# EAGLE board BeagleBone_Blue (EAGLE 7.6.0), part 1 of 3
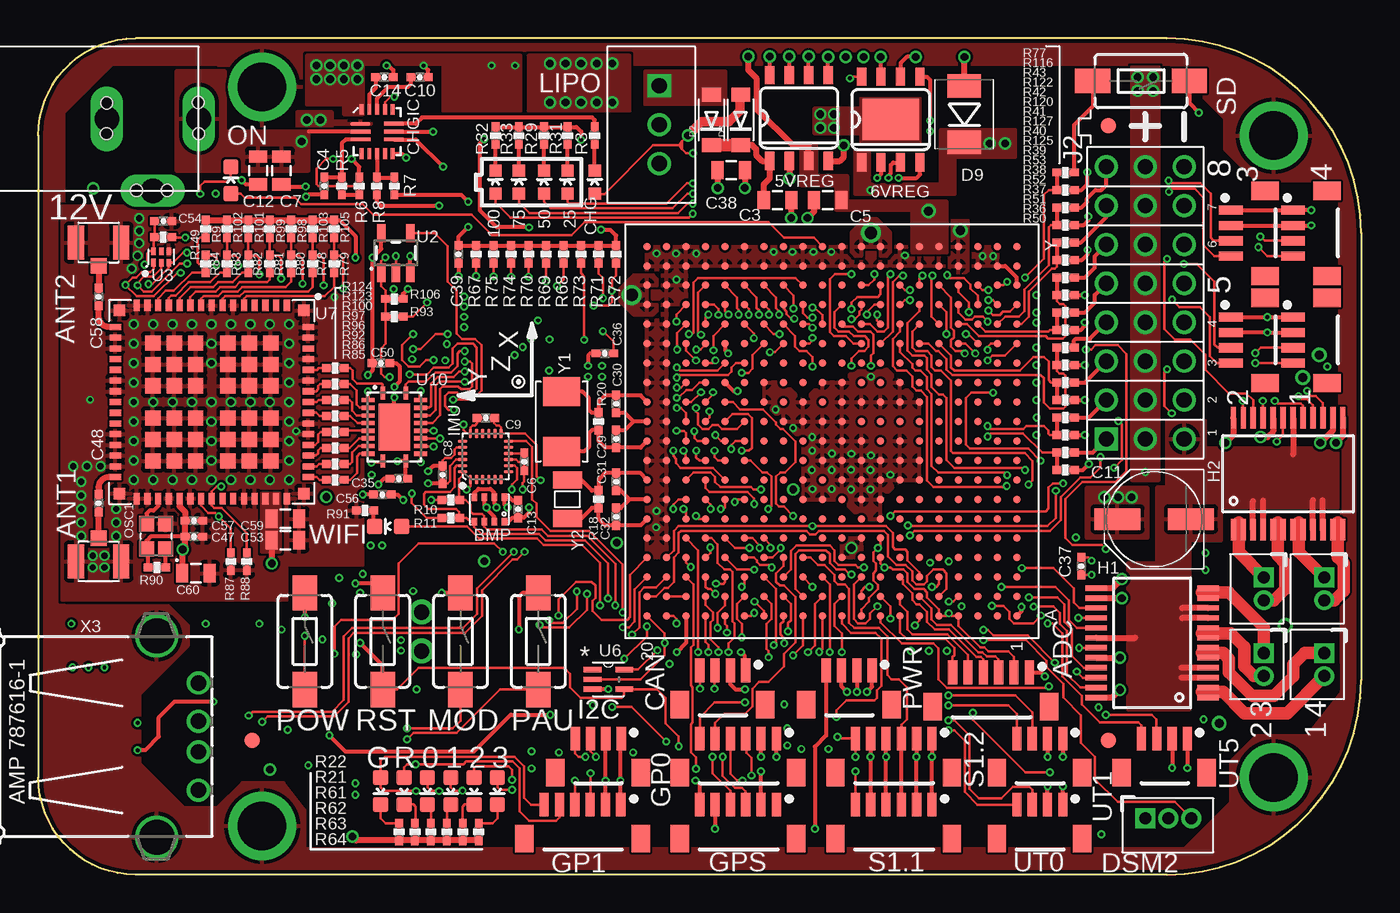
[diagram p0: board, top side]
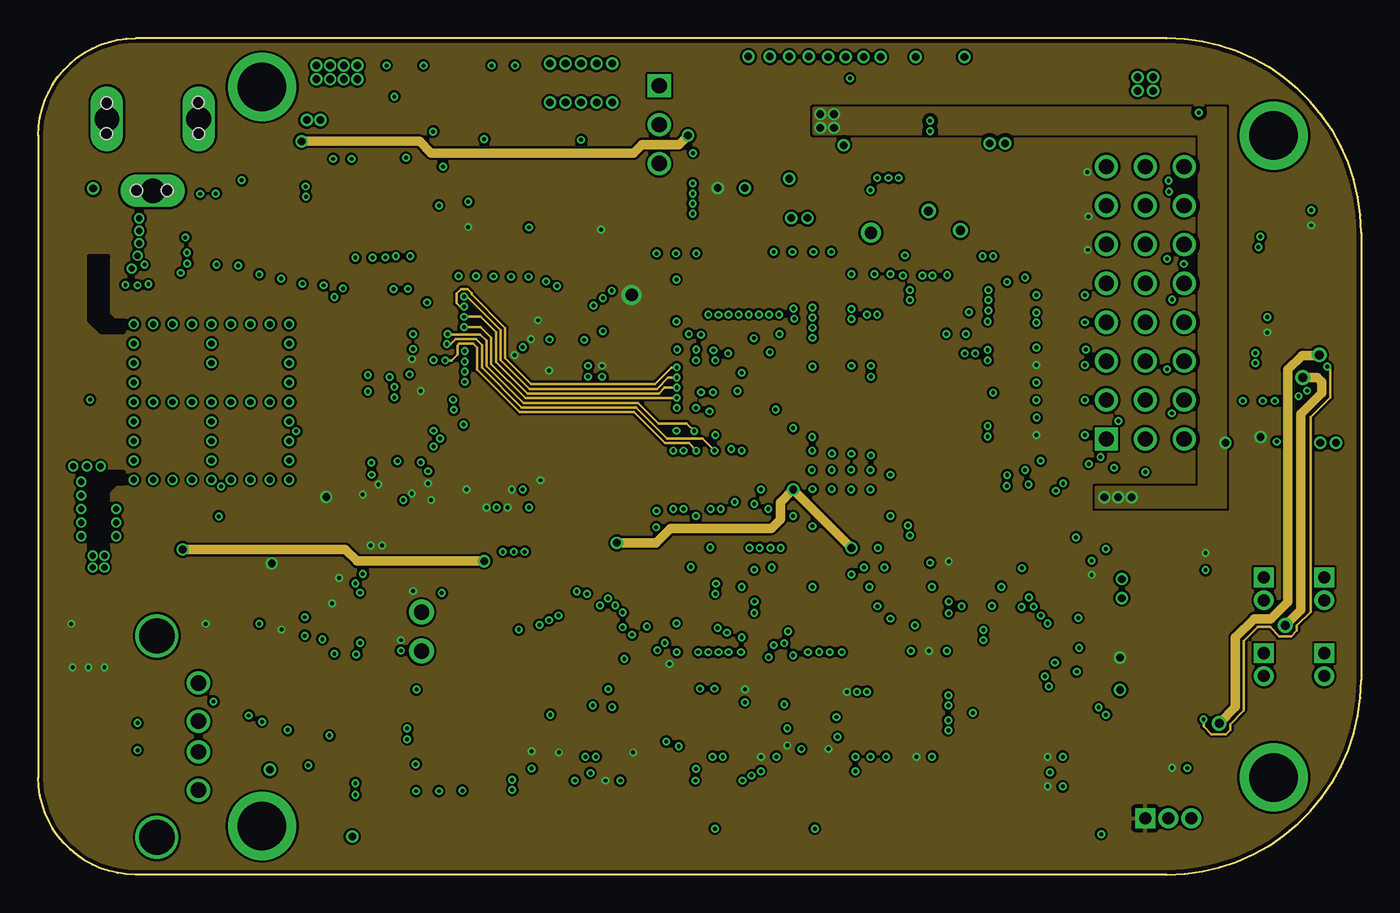
[diagram p1: board, inner layer Route2]
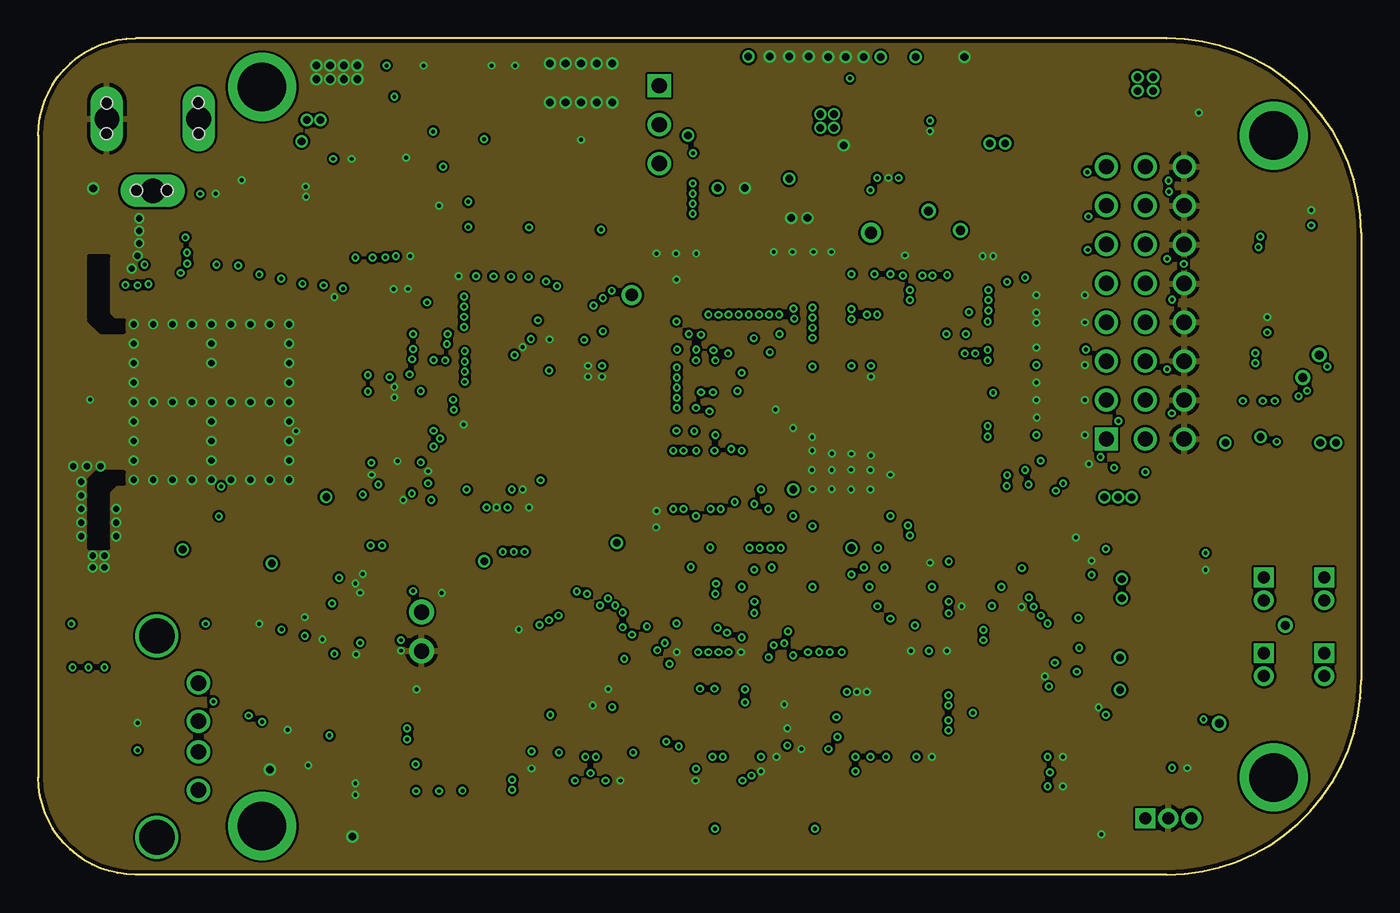
[diagram p2: board, inner layer Route15]
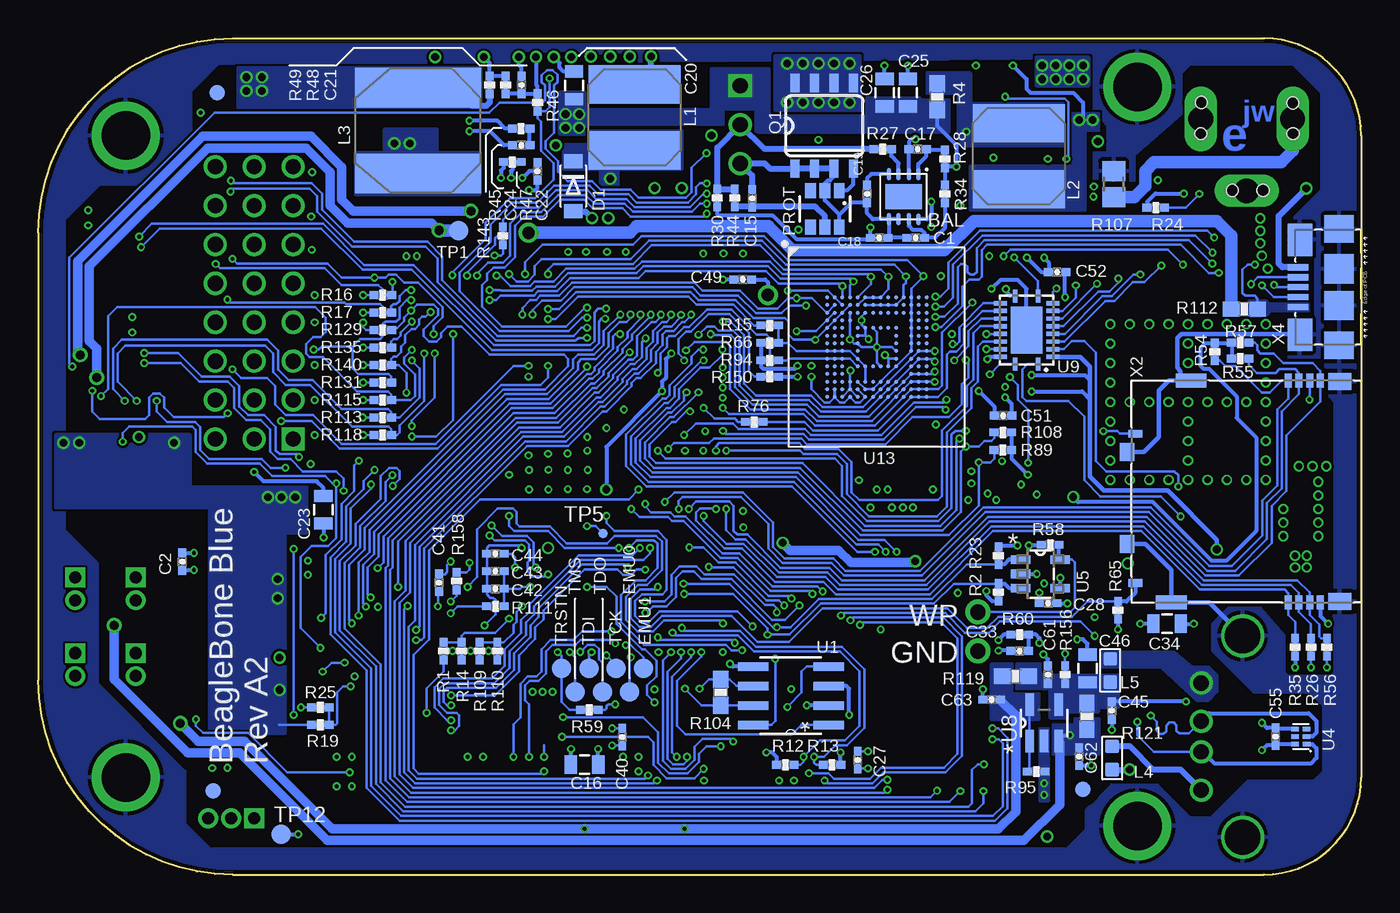
[diagram p3: board, bottom side, seen from below]

Size 86.36 x 54.61 mm. Coordinates in mm from the lower left corner, seen from the top.
Copper layers (1+2*15+16): Top 0.0178mm / dielectric 12mil / Route2 0.0356mm / dielectric 28mil / Route15 0.0356mm / dielectric 12mil / Bottom 0.0178mm
Design rules "SSC-EAGLE-4Lyr_v1.0.0.3 *": minimum track width 6mil, minimum drill 10mil, track to track 6mil, track to pad 6mil, pad to pad 6mil, via to via 6mil, smd to smd 6mil, copper to edge 10mil, drill to drill 8mil, minimum pad ring 10mil, minimum via ring 5mil, stop-mask expansion 3mil, vias tented up to drill 40mil, thermal gap 10mil
Net classes: 0 default: width 0.152 mm, drill 0.254 mm, clearance 0.152 mm; 1 ground: width 0.152 mm, drill 0.254 mm, clearance 0.152 mm; 2 usb: width 0.152 mm, drill 0.254 mm, clearance 0.152 mm; 3 power: width 0.152 mm, drill 0.254 mm, clearance 0.152 mm

## Footprints (pad centres in the part's own frame; a part is rotated, then mirrored left to right if it is on the bottom)
BEAGLEBONE_BLUE_LED-0603 = smd 1 x 1: A 0,-0.877; C 0,0.877
BEAGLEBONE_BLUE_SO08-TIGHT = smd 0.6 x 1.2: 1 -1.905,-2.8; 2 -0.635,-2.8; 3 0.635,-2.8; 4 1.905,-2.8; 5 1.905,2.8; 6 0.635,2.8; 7 -0.635,2.8; 8 -1.905,2.8
SO08-EXPOSED = smd 0.6 x 1.2: 1 -1.905,-2.8; 2 -0.635,-2.8; 3 0.635,-2.8; 4 1.905,-2.8; 5 1.905,2.8; 6 0.635,2.8; 7 -0.635,2.8; 8 -1.905,2.8 | smd 3.683 x 2.718: 9 0,0
PJ-102B_POWER_CON = drill 1.6 long: IN -6,0; OUT 0,0; OUT_CON -3,4.7 | hole 0.762: 0,-1.041; 0.025,0.965; -5.994,0.965; -5.969,-1.067; -1.93,4.674; -3.937,4.674
JST_SH_6 = smd 0.6 x 1.55: 1 5,0; 2 4,0; 3 3,0; 4 2,0; 5 1,0; 6 0,0 | smd 1.2 x 1.8: P$1 -1.3,-2.225; P$2 6.3,-2.225
U.FL-R-SMT-1 = smd 1.05 x 2.2: GND1 -1.475,0; GND2 1.475,0 | smd 1.05 x 1: SIG 0,-1.525
LED-0603 = smd 0.8 x 0.8: A 0,-0.75; C 0,0.75
8-SON_3X3MM = smd 0.305 x 0.813: 1 -0.965,-1.473; 2 -0.33,-1.473; 3 0.33,-1.473; 4 0.965,-1.473; 5 0.965,1.473; 6 0.33,1.473; 7 -0.33,1.473 | smd 0.305 x 0.787: 8 -0.965,1.473 | smd 2.4 x 1.651: PAD 0,0
BMP280 = smd 0.5 x 0.35: 1 0.8,0.975; 2 0.8,0.325; 3 0.8,-0.325; 4 0.8,-0.975; 5 -0.8,-0.975; 6 -0.8,-0.325; 7 -0.8,0.325; 8 -0.8,0.975
0402-CAP = smd 0.61 x 0.508: 1 -0.559,0; 2 0.559,0
0805 = smd 0.8 x 1.2: 1 -0.9,0; 2 0.9,0
PANASONIC_D = smd 3 x 1.4: + 2.4,0; - -2.4,0
JST_SH_4_SMD = smd 0.6 x 1.55: 1 0.46,1.27; 2 -0.54,1.27; 3 -1.54,1.27; 4 -2.54,1.27 | smd 1.2 x 1.8: P$1 -3.84,-0.955; P$2 1.728,-0.955
MP2615 = smd 1.295 x 0.254: 1 -1.092,0.508; 2 -1.092,0; 3 -1.092,-0.508; 9 1.092,-0.508; 10 1.092,0; 11 1.092,0.508 | smd 0.254 x 0.711: 4 -1.016,-1.448; 5 -0.508,-1.448; 6 0,-1.448; 7 0.508,-1.448; 8 1.016,-1.448; 12 1.016,1.448; 13 0.508,1.448; 14 0,1.448; 15 -0.508,1.448; 16 -1.016,1.448
ADAFRUIT_SOD-123FL = smd 0.91 x 1.22: A 1.637,0; C -1.637,0
DO-214AA = smd 1.524 x 2.184: A 1.841,0; C -1.841,0
JST_ZH_3 = drill 0.787 square: P$1 0,0 | drill 0.787: P$2 1.499,0; P$3 2.997,0
B1,27 = smd 1.27 x 1.27: TP 0,0
FIDUCIAL_40MIL = smd 1.016 x 1.016: P$1 0,0
GHI2_TESTPAD/W_HOLE_1X1 = drill 1 pad 1.626: P$1 0,0
SSOP24 = smd 0.348 x 1.397: 1 -3.575,-3.656; 2 -2.925,-3.656; 3 -2.275,-3.656; 4 -1.625,-3.656; 5 -0.975,-3.656; 6 -0.325,-3.656; 7 0.325,-3.656; 8 0.975,-3.656; 9 1.625,-3.656; 10 2.275,-3.656; 11 2.925,-3.656; 12 3.575,-3.656; 13 3.575,3.656; 14 2.925,3.656; 15 2.275,3.656; 16 1.625,3.656; 17 0.975,3.656; 18 0.325,3.656; 19 -0.325,3.656; 20 -0.975,3.656; 21 -1.625,3.656; 22 -2.275,3.656; 23 -2.925,3.656; 24 -3.575,3.656
QFN24G-0.4-3X3MM = smd 0.6 x 0.2: 1 -1.5,1; 2 -1.5,0.6; 3 -1.5,0.2; 4 -1.5,-0.2; 5 -1.5,-0.6; 6 -1.5,-1; 13 1.5,-1; 14 1.5,-0.6; 15 1.5,-0.2; 16 1.5,0.2; 17 1.5,0.6; 18 1.5,1 | smd 0.2 x 0.6: 7 -1,-1.5; 8 -0.6,-1.5; 9 -0.2,-1.5; 10 0.2,-1.5; 11 0.6,-1.5; 12 1,-1.5; 19 1,1.5; 20 0.6,1.5; 21 0.2,1.5; 22 -0.2,1.5; 23 -0.6,1.5; 24 -1,1.5
STRAWSON_EAGLE_LIB_3X8_0.1"_HEADER = drill 1 square: P$1 -2.54,-17.78 | drill 1: P$2 -2.54,-15.24; P$3 -2.54,-12.7; P$4 -2.54,-10.16; P$5 -2.54,-7.62; P$6 -2.54,-5.08; P$7 0,-17.78; P$8 0,-15.24; P$9 0,-12.7; P$10 0,-10.16; P$11 0,-7.62; P$12 0,-5.08; P$13 2.54,-17.78; P$14 2.54,-15.24; P$15 2.54,-12.7; P$16 2.54,-10.16; P$17 2.54,-7.62; P$18 2.54,-5.08; P$19 -2.54,-2.54; P$20 -2.54,0; P$21 0,-2.54; P$22 0,0; P$23 2.54,-2.54; P$24 2.54,0
SRN6045 = smd 2.5 x 6: 1 -2.175,-0.175; 2 2.125,-0.175
8X8MM_INDUCTOR = smd 2.591 x 8.204: 1 -2.794,0; 2 2.794,0
L0603 = smd 0.889 x 0.889: 1 -0.762,0; 2 0.762,0
JST_XH_3-PIN = drill 1 square: P$1 0,0 | drill 1: P$2 0,-2.54; P$3 0,-5.08
JST_ZH_2 = drill 0.787 pad 1.219 square: P$1 -0.749,0 | drill 0.787 pad 1.219: P$2 0.749,0
MOUNTING_HOLE = drill 3.175 pad 4.445: P$1 0,0
TACTILE-SWITCH-1101NE = smd 2.3 x 1.6: 1 -3.15,0; 2 3.15,0
NZ2520S = smd 1 x 1: 1 -0.825,-0.625; 2 0.825,-0.625; 3 0.825,0.625; 4 -0.825,0.625
SOT-236 = smd 0.991 x 0.711: 1 -1.194,0.94; 2 -1.194,0; 3 -1.194,-0.94; 4 1.194,-0.94; 5 1.194,0; 6 1.194,0.94
SO08-TIGHT = smd 0.6 x 1.2: 1 -1.905,-2.8; 2 -0.635,-2.8; 3 0.635,-2.8; 4 1.905,-2.8; 5 1.905,2.8; 6 0.635,2.8; 7 -0.635,2.8; 8 -1.905,2.8
0402-RES = smd 0.61 x 0.508: 1 -0.559,0; 2 0.559,0
0603-RES = smd 1.1 x 1: 1 -0.85,0; 2 0.85,0
R0805 = smd 1.3 x 1.5: 1 -0.85,0; 2 0.85,0
BEAGLEBONE_BLUE_OSD3358 = smd 0.5 x 0.5: A1 -12.065,-12.065; A2 -12.065,-10.795; A3 -12.065,-9.525; A4 -12.065,-8.255; A5 -12.065,-6.985; A6 -12.065,-5.715; A7 -12.065,-4.445; A8 -12.065,-3.175; A9 -12.065,-1.905; A10 -12.065,-0.635; A11 -12.065,0.635; A12 -12.065,1.905; A13 -12.065,3.175; A14 -12.065,4.445; A15 -12.065,5.715; A16 -12.065,6.985; A17 -12.065,8.255; A18 -12.065,9.525; A19 -12.065,10.795; A20 -12.065,12.065; B1 -10.795,-12.065; B2 -10.795,-10.795; B3 -10.795,-9.525; B4 -10.795,-8.255; B5 -10.795,-6.985; B6 -10.795,-5.715; B7 -10.795,-4.445; B8 -10.795,-3.175; B9 -10.795,-1.905; B10 -10.795,-0.635; B11 -10.795,0.635; B12 -10.795,1.905; B13 -10.795,3.175; B14 -10.795,4.445; B15 -10.795,5.715; B16 -10.795,6.985; B17 -10.795,8.255; B18 -10.795,9.525; B19 -10.795,10.795; B20 -10.795,12.065; C1 -9.525,-12.065; C2 -9.525,-10.795; C3 -9.525,-9.525; C4 -9.525,-8.255; C5 -9.525,-6.985; C6 -9.525,-5.715; C7 -9.525,-4.445; C8 -9.525,-3.175; C9 -9.525,-1.905; C10 -9.525,-0.635; C11 -9.525,0.635; C12 -9.525,1.905; C13 -9.525,3.175; C14 -9.525,4.445; C15 -9.525,5.715; C16 -9.525,6.985; C17 -9.525,8.255; C18 -9.525,9.525; C19 -9.525,10.795; C20 -9.525,12.065; D1 -8.255,-12.065; D2 -8.255,-10.795; D3 -8.255,-9.525; D4 -8.255,-8.255; D5 -8.255,-6.985; D6 -8.255,-5.715; D7 -8.255,-4.445; D8 -8.255,-3.175; D9 -8.255,-1.905; D10 -8.255,-0.635; D11 -8.255,0.635; D12 -8.255,1.905; D13 -8.255,3.175; D14 -8.255,4.445; D15 -8.255,5.715; D16 -8.255,6.985; D17 -8.255,8.255; D18 -8.255,9.525; D19 -8.255,10.795; D20 -8.255,12.065; E1 -6.985,-12.065; E2 -6.985,-10.795; E3 -6.985,-9.525; E4 -6.985,-8.255; E5 -6.985,-6.985; E6 -6.985,-5.715; E7 -6.985,-4.445; E8 -6.985,-3.175; E9 -6.985,-1.905; E10 -6.985,-0.635; E11 -6.985,0.635; E12 -6.985,1.905; E13 -6.985,3.175; E14 -6.985,4.445; E15 -6.985,5.715; E16 -6.985,6.985; E17 -6.985,8.255; E18 -6.985,9.525; E19 -6.985,10.795; E20 -6.985,12.065; F1 -5.715,-12.065; F2 -5.715,-10.795; F3 -5.715,-9.525; F4 -5.715,-8.255; F5 -5.715,-6.985; F6 -5.715,-5.715; F7 -5.715,-4.445; F8 -5.715,-3.175; F9 -5.715,-1.905; F10 -5.715,-0.635; F11 -5.715,0.635; F12 -5.715,1.905; F13 -5.715,3.175; F14 -5.715,4.445; F15 -5.715,5.715; F16 -5.715,6.985; F17 -5.715,8.255; F18 -5.715,9.525; F19 -5.715,10.795; F20 -5.715,12.065; G1 -4.445,-12.065; G2 -4.445,-10.795; G3 -4.445,-9.525; G4 -4.445,-8.255; G5 -4.445,-6.985; G6 -4.445,-5.715; G7 -4.445,-4.445; G8 -4.445,-3.175; G9 -4.445,-1.905; G10 -4.445,-0.635; G11 -4.445,0.635; G12 -4.445,1.905; G13 -4.445,3.175; G14 -4.445,4.445; G15 -4.445,5.715; G16 -4.445,6.985; G17 -4.445,8.255; G18 -4.445,9.525; G19 -4.445,10.795; G20 -4.445,12.065; H1 -3.175,-12.065; H2 -3.175,-10.795; H3 -3.175,-9.525; H4 -3.175,-8.255; H5 -3.175,-6.985; H6 -3.175,-5.715; H7 -3.175,-4.445; H8 -3.175,-3.175; H9 -3.175,-1.905; H10 -3.175,-0.635; H11 -3.175,0.635; H12 -3.175,1.905; H13 -3.175,3.175; H14 -3.175,4.445; H15 -3.175,5.715; H16 -3.175,6.985; H17 -3.175,8.255; H18 -3.175,9.525; H19 -3.175,10.795; H20 -3.175,12.065; J1 -1.905,-12.065; J2 -1.905,-10.795; J3 -1.905,-9.525; J4 -1.905,-8.255; J5 -1.905,-6.985; J6 -1.905,-5.715; J7 -1.905,-4.445; J8 -1.905,-3.175; J9 -1.905,-1.905; J10 -1.905,-0.635; J11 -1.905,0.635; J12 -1.905,1.905; J13 -1.905,3.175; J14 -1.905,4.445; J15 -1.905,5.715; J16 -1.905,6.985; J17 -1.905,8.255; J18 -1.905,9.525; J19 -1.905,10.795; J20 -1.905,12.065; K1 -0.635,-12.065; K2 -0.635,-10.795; K3 -0.635,-9.525; K4 -0.635,-8.255; K5 -0.635,-6.985; K6 -0.635,-5.715; K7 -0.635,-4.445; K8 -0.635,-3.175; K9 -0.635,-1.905; K10 -0.635,-0.635; K11 -0.635,0.635; K12 -0.635,1.905; K13 -0.635,3.175; K14 -0.635,4.445; K15 -0.635,5.715; K16 -0.635,6.985; K17 -0.635,8.255; K18 -0.635,9.525; K19 -0.635,10.795; K20 -0.635,12.065; L1 0.635,-12.065; L2 0.635,-10.795; L3 0.635,-9.525; L4 0.635,-8.255; L5 0.635,-6.985; L6 0.635,-5.715; L7 0.635,-4.445; L8 0.635,-3.175; L9 0.635,-1.905; L10 0.635,-0.635; L11 0.635,0.635; L12 0.635,1.905; L13 0.635,3.175; L14 0.635,4.445; L15 0.635,5.715; L16 0.635,6.985; L17 0.635,8.255; L18 0.635,9.525; L19 0.635,10.795; L20 0.635,12.065; M1 1.905,-12.065; M2 1.905,-10.795; M3 1.905,-9.525; M4 1.905,-8.255; M5 1.905,-6.985; M6 1.905,-5.715; M7 1.905,-4.445; M8 1.905,-3.175; M9 1.905,-1.905; M10 1.905,-0.635; M11 1.905,0.635; M12 1.905,1.905; M13 1.905,3.175; M14 1.905,4.445; M15 1.905,5.715; M16 1.905,6.985; M17 1.905,8.255; M18 1.905,9.525; M19 1.905,10.795; M20 1.905,12.065; N1 3.175,-12.065; N2 3.175,-10.795; N3 3.175,-9.525; N4 3.175,-8.255; N5 3.175,-6.985; N6 3.175,-5.715; N7 3.175,-4.445; N8 3.175,-3.175; N9 3.175,-1.905; N10 3.175,-0.635; N11 3.175,0.635; N12 3.175,1.905; N13 3.175,3.175; N14 3.175,4.445; N15 3.175,5.715; N16 3.175,6.985; N17 3.175,8.255; N18 3.175,9.525; N19 3.175,10.795; N20 3.175,12.065; P1 4.445,-12.065; P2 4.445,-10.795; P3 4.445,-9.525; P4 4.445,-8.255; P5 4.445,-6.985; P6 4.445,-5.715; P7 4.445,-4.445; P8 4.445,-3.175; P9 4.445,-1.905; P10 4.445,-0.635; P11 4.445,0.635; P12 4.445,1.905; P13 4.445,3.175; P14 4.445,4.445; P15 4.445,5.715; P16 4.445,6.985; P17 4.445,8.255; P18 4.445,9.525; P19 4.445,10.795; P20 4.445,12.065; R1 5.715,-12.065; R2 5.715,-10.795; R3 5.715,-9.525; R4 5.715,-8.255; R5 5.715,-6.985; R6 5.715,-5.715; R7 5.715,-4.445; R8 5.715,-3.175; R9 5.715,-1.905; R10 5.715,-0.635; R11 5.715,0.635; R12 5.715,1.905; R13 5.715,3.175; R14 5.715,4.445; R15 5.715,5.715; R16 5.715,6.985; R17 5.715,8.255; R18 5.715,9.525; R19 5.715,10.795; R20 5.715,12.065; T1 6.985,-12.065; T2 6.985,-10.795; T3 6.985,-9.525; T4 6.985,-8.255; T5 6.985,-6.985; T6 6.985,-5.715; T7 6.985,-4.445; T8 6.985,-3.175; T9 6.985,-1.905; T10 6.985,-0.635; T11 6.985,0.635; T12 6.985,1.905; T13 6.985,3.175; T14 6.985,4.445; T15 6.985,5.715; T16 6.985,6.985; T17 6.985,8.255; T18 6.985,9.525; T19 6.985,10.795; T20 6.985,12.065; U1 8.255,-12.065; U2 8.255,-10.795; U3 8.255,-9.525; U4 8.255,-8.255; U5 8.255,-6.985; U6 8.255,-5.715; U7 8.255,-4.445; U8 8.255,-3.175; U9 8.255,-1.905; U10 8.255,-0.635; U11 8.255,0.635; U12 8.255,1.905; U13 8.255,3.175; U14 8.255,4.445; U15 8.255,5.715; U16 8.255,6.985; U17 8.255,8.255; U18 8.255,9.525; U19 8.255,10.795; U20 8.255,12.065; V1 9.525,-12.065; V2 9.525,-10.795; V3 9.525,-9.525; V4 9.525,-8.255; V5 9.525,-6.985; V6 9.525,-5.715; V7 9.525,-4.445; V8 9.525,-3.175; V9 9.525,-1.905; V10 9.525,-0.635; V11 9.525,0.635; V12 9.525,1.905; V13 9.525,3.175; V14 9.525,4.445; V15 9.525,5.715; V16 9.525,6.985; V17 9.525,8.255; V18 9.525,9.525; V19 9.525,10.795; V20 9.525,12.065; W1 10.795,-12.065; W2 10.795,-10.795; W3 10.795,-9.525; W4 10.795,-8.255; W5 10.795,-6.985; W6 10.795,-5.715; W7 10.795,-4.445; W8 10.795,-3.175; W9 10.795,-1.905; W10 10.795,-0.635; W11 10.795,0.635; W12 10.795,1.905; W13 10.795,3.175; W14 10.795,4.445; W15 10.795,5.715; W16 10.795,6.985; W17 10.795,8.255; W18 10.795,9.525; W19 10.795,10.795; W20 10.795,12.065; Y1 12.065,-12.065; Y2 12.065,-10.795; Y3 12.065,-9.525; Y4 12.065,-8.255; Y5 12.065,-6.985; Y6 12.065,-5.715; Y7 12.065,-4.445; Y8 12.065,-3.175; Y9 12.065,-1.905; Y10 12.065,-0.635; Y11 12.065,0.635; Y12 12.065,1.905; Y13 12.065,3.175; Y14 12.065,4.445; Y15 12.065,5.715; Y16 12.065,6.985; Y17 12.065,8.255; Y18 12.065,9.525; Y19 12.065,10.795; Y20 12.065,12.065
BEAGLEBONE_BLUE_B0,65 = smd 0.635 x 0.635: TP 0,0
BEAGLEBONE_BLUE_D8 = smd 1.981 x 0.559: 1 -2.464,1.905; 2 -2.464,0.635; 3 -2.464,-0.635; 4 -2.464,-1.905; 5 2.464,-1.905; 6 2.464,-0.635; 7 2.464,0.635; 8 2.464,1.905
BEAGLEBONE_BLUE_SOT23-5 = smd 0.55 x 1.2: 1 -0.95,-1.3; 2 0,-1.3; 3 0.95,-1.3; 4 0.95,1.3; 5 -0.95,1.3
SON-6(TI)-DRY = smd 0.3 x 0.52: 1 -0.5,-0.38 | smd 0.3 x 0.49: 2 0,-0.375; 3 0.5,-0.375; 4 0.5,0.375; 5 0,0.375; 6 -0.5,0.375
SOT95P290X145-5N = smd 1.27 x 0.559: 1 -1.295,0.94; 2 -1.295,0; 3 -1.295,-0.94; 4 1.295,-0.94; 5 1.295,0.94
BEAGLEBONE_BLUE_DCK5 = smd 1.168 x 0.356: 1 -1.041,0.65; 2 -1.041,0; 3 -1.041,-0.65; 4 1.041,-0.65; 5 1.041,0.65
MOC-100(TI) = smd 0.75 x 0.75: 1 -6.025,-5.975; 17 6.025,-5.975; 33 6.025,5.975; 49 -6.025,5.975 | smd 0.4 x 0.75: 2 -4.9,-6.3; 3 -4.2,-6.3; 4 -3.5,-6.3; 5 -2.8,-6.3; 6 -2.1,-6.3; 7 -1.4,-6.3; 8 -0.7,-6.3; 9 0,-6.3; 10 0.7,-6.3; 11 1.4,-6.3; 12 2.1,-6.3; 13 2.8,-6.3; 14 3.5,-6.3; 15 4.2,-6.3; 16 4.9,-6.3; 34 4.9,6.3; 35 4.2,6.3; 36 3.5,6.3; 37 2.8,6.3; 38 2.1,6.3; 39 1.4,6.3; 40 0.7,6.3; 41 0,6.3; 42 -0.7,6.3; 43 -1.4,6.3; 44 -2.1,6.3; 45 -2.8,6.3; 46 -3.5,6.3; 47 -4.2,6.3; 48 -4.9,6.3 | smd 0.75 x 0.4: 18 6.3,-4.9; 19 6.3,-4.2; 20 6.3,-3.5; 21 6.3,-2.8; 22 6.3,-2.1; 23 6.3,-1.4; 24 6.3,-0.7; 25 6.3,0; 26 6.3,0.7; 27 6.3,1.4; 28 6.3,2.1; 29 6.3,2.8; 30 6.3,3.5; 31 6.3,4.2; 32 6.3,4.9; 50 -6.3,4.9; 51 -6.3,4.2; 52 -6.3,3.5; 53 -6.3,2.8; 54 -6.3,2.1; 55 -6.3,1.4; 56 -6.3,0.7; 57 -6.3,0; 58 -6.3,-0.7; 59 -6.3,-1.4; 60 -6.3,-2.1; 61 -6.3,-2.8; 62 -6.3,-3.5; 63 -6.3,-4.2; 64 -6.3,-4.9 | smd 1 x 1: G1 -3.85,-3.85; G2 -2.45,-3.85; G3 -1.05,-3.85; G4 1.05,-3.85; G5 2.45,-3.85; G6 3.85,-3.85; G7 -3.85,-2.45; G8 -2.45,-2.45; G9 -1.05,-2.45; G10 1.05,-2.45; G11 2.45,-2.45; G12 3.85,-2.45; G13 -3.85,-1.05; G14 -2.45,-1.05; G15 -1.05,-1.05; G16 1.05,-1.05; G17 2.45,-1.05; G18 3.85,-1.05; G19 -3.85,1.05; G20 -2.45,1.05; G21 -1.05,1.05; G22 1.05,1.05; G23 2.45,1.05; G24 3.85,1.05; G25 -3.85,2.45; G26 -2.45,2.45; G27 -1.05,2.45; G28 1.05,2.45; G29 2.45,2.45; G30 3.85,2.45; G31 -3.85,3.85; G32 -2.45,3.85; G33 -1.05,3.85; G34 1.05,3.85; G35 2.45,3.85; G36 3.85,3.85
DBV5 = smd 1.473 x 0.559: 1 -1.194,0.95; 2 -1.194,0; 3 -1.194,-0.95; 4 1.194,-0.95; 5 1.194,0.95
R-PVQFN-N20(TI) = smd 0.85 x 0.28: 1 -2.225,-0.75; 10 2.225,-0.75; 11 2.225,0.75; 20 -2.225,0.75 | smd 0.28 x 0.85: 2 -1.75,-1.725; 3 -1.25,-1.725; 4 -0.75,-1.725; 5 -0.25,-1.725; 6 0.25,-1.725; 7 0.75,-1.725; 8 1.25,-1.725; 9 1.75,-1.725; 12 1.75,1.725; 13 1.25,1.725; 14 0.75,1.725; 15 0.25,1.725; 16 -0.25,1.725; 17 -0.75,1.725; 18 -1.25,1.725; 19 -1.75,1.725 | smd 3.05 x 2.05: TP 0,0
MICRON_EMMC_153 = smd 0.245 x 0.245: A1 -3.25,3.25; A2 -2.75,3.25; A3 -2.25,3.25; A4 -1.75,3.25; A5 -1.25,3.25; A6 -0.75,3.25; A7 -0.25,3.25; A8 0.25,3.25; A9 0.75,3.25; A10 1.25,3.25; A11 1.75,3.25; A12 2.25,3.25; A13 2.75,3.25; A14 3.25,3.25; B1 -3.25,2.75; B2 -2.75,2.75; B3 -2.25,2.75; B4 -1.75,2.75; B5 -1.25,2.75; B6 -0.75,2.75; B7 -0.25,2.75; B8 0.25,2.75; B9 0.75,2.75; B10 1.25,2.75; B11 1.75,2.75; B12 2.25,2.75; B13 2.75,2.75; B14 3.25,2.75; C1 -3.25,2.25; C2 -2.75,2.25; C3 -2.25,2.25; C4 -1.75,2.25; C5 -1.25,2.25; C6 -0.75,2.25; C7 -0.25,2.25; C8 0.25,2.25; C9 0.75,2.25; C10 1.25,2.25; C11 1.75,2.25; C12 2.25,2.25; C13 2.75,2.25; C14 3.25,2.25; D1 -3.25,1.75; D2 -2.75,1.75; D3 -2.25,1.75; D4 -1.75,1.75; D12 2.25,1.75; D13 2.75,1.75; D14 3.25,1.75; E1 -3.25,1.25; E2 -2.75,1.25; E3 -2.25,1.25; E5 -1.25,1.25; E6 -0.75,1.25; E7 -0.25,1.25; E8 0.25,1.25; E9 0.75,1.25; E10 1.25,1.25; E12 2.25,1.25; E13 2.75,1.25; E14 3.25,1.25; F1 -3.25,0.75; F2 -2.75,0.75; F3 -2.25,0.75; F5 -1.25,0.75; F10 1.25,0.75; F12 2.25,0.75; F13 2.75,0.75; F14 3.25,0.75; G1 -3.25,0.25; G2 -2.75,0.25; G3 -2.25,0.25; G5 -1.25,0.25; G10 1.25,0.25; G12 2.25,0.25; G13 2.75,0.25; G14 3.25,0.25; H1 -3.25,-0.25; H2 -2.75,-0.25; H3 -2.25,-0.25; H5 -1.25,-0.25; H10 1.25,-0.25; H12 2.25,-0.25; H13 2.75,-0.25; H14 3.25,-0.25; J1 -3.25,-0.75; J2 -2.75,-0.75; J3 -2.25,-0.75; J5 -1.25,-0.75; J10 1.25,-0.75; J12 2.25,-0.75; J13 2.75,-0.75; J14 3.25,-0.75; K1 -3.25,-1.25; K2 -2.75,-1.25; K3 -2.25,-1.25; K5 -1.25,-1.25; K6 -0.75,-1.25; K7 -0.25,-1.25; K8 0.25,-1.25; K9 0.75,-1.25; K10 1.25,-1.25; K12 2.25,-1.25; K13 2.75,-1.25; K14 3.25,-1.25; L1 -3.25,-1.75; L2 -2.75,-1.75; L3 -2.25,-1.75; L12 2.25,-1.75; L13 2.75,-1.75; L14 3.25,-1.75; M1 -3.25,-2.25; M2 -2.75,-2.25; M3 -2.25,-2.25; M4 -1.75,-2.25; M5 -1.25,-2.25; M6 -0.75,-2.25; M7 -0.25,-2.25; M8 0.25,-2.25; M9 0.75,-2.25; M10 1.25,-2.25; M11 1.75,-2.25; M12 2.25,-2.25; M13 2.75,-2.25; M14 3.25,-2.25; N1 -3.25,-2.75; N2 -2.75,-2.75; N3 -2.25,-2.75; N4 -1.75,-2.75; N5 -1.25,-2.75; N6 -0.75,-2.75; N7 -0.25,-2.75; N8 0.25,-2.75; N9 0.75,-2.75; N10 1.25,-2.75; N11 1.75,-2.75; N12 2.25,-2.75; N13 2.75,-2.75; N14 3.25,-2.75; P1 -3.25,-3.25; P2 -2.75,-3.25; P3 -2.25,-3.25; P4 -1.75,-3.25; P5 -1.25,-3.25; P6 -0.75,-3.25; P7 -0.25,-3.25; P8 0.25,-3.25; P9 0.75,-3.25; P10 1.25,-3.25; P11 1.75,-3.25; P12 2.25,-3.25; P13 2.75,-3.25; P14 3.25,-3.25
SCHA5B0200 = smd 0.9 x 0.45: 1 -7.25,3.365; 2 -7.25,2.665; 3 -7.25,1.965; 4 -7.25,1.265; 5 7.25,1.265; 6 7.25,1.965; 7 7.25,2.665; 8 7.25,3.365 | smd 0.5 x 0.9: CD -5.975,13.35; GND 3.775,13.35 | smd 0.9 x 2: CGND1 -7.25,11; CGND4 7.25,9.7 | smd 1.1 x 1.5: CGND2 -7.188,0; CGND3 7.188,0 | smd 1.2 x 0.95: CGND5 2.575,13.9; CGND6 -3.425,13.9
USB_HOST_HORIZONTAL_W/CHASSIS_GND = drill 1: 1 -3.5,12.99; 2 -1,12.99; 3 1,12.99; 4 3.5,12.99 | drill 2.3: 5 -6.57,10.28; 6 6.57,10.28
10118192-0001LF(MICRO-USB-B-AMPHENOL-FCI) = smd 1.8 x 1.9: CGND1 -3.8,0; CGND4 3.8,0 | smd 1.9 x 1.9: CGND2 -1.2,0; CGND3 1.2,0 | smd 2.1 x 1.6: CGND5 3.1,2.55; CGND6 -3.1,2.55 | smd 0.4 x 1.35: D+ 0,2.675; D- -0.65,2.675; GND 1.3,2.675; ID 0.65,2.675; VBUS -1.3,2.675
CRYSTAL_5X3.2MM = smd 1.9 x 2.4: 1 -1.95,0; 2 1.95,0
CRYSTAL_3.2X1.5 = smd 1.1 x 1.9: P$1 -1.25,0; P$2 1.25,0

## Placement (x,y rotation side)
0  BLUE  [BEAGLEBONE_BLUE_LED-0603]  25.4,5.46 180 top
1  BLUE  [BEAGLEBONE_BLUE_LED-0603]  26.92,5.46 180 top
2  BLUE  [BEAGLEBONE_BLUE_LED-0603]  28.45,5.46 180 top
3  BLUE  [BEAGLEBONE_BLUE_LED-0603]  29.97,5.46 180 top
5VREG  AP1509SOIC-8-TIGHT  [BEAGLEBONE_BLUE_SO08-TIGHT]  49.66,49.4 0 top
6VREG  AOZ1284  [SO08-EXPOSED]  55.65,49.3 0 top
12V  PJ-102B_POWER_CON  [PJ-102B_POWER_CON]  4.47,49.35 180 top
ADC  JST_SH_6  [JST_SH_6]  59.69,13.21 0 top
ANT1  U.FL-R-SMT-1(10)  [U.FL-R-SMT-1]  3.94,20.45 180 top
ANT2  U.FL-R-SMT-1(10)  [U.FL-R-SMT-1]  3.94,41.27 0 top
B0  RED  [LED-0603]  34.54,45.21 0 top
B1  GREEN  [LED-0603]  33.02,45.21 0 top
B2  GREEN  [LED-0603]  31.37,45.21 0 top
B3  GREEN  [LED-0603]  29.84,45.21 0 top
BAL  BQ29209  [8-SON_3X3MM]  29.87,44.27 180 bottom
BMP  BMP280  [BMP280]  29.44,23.85 270 top
BOARD  [BEAGLEBONE_BLUE_NO_HOLES]  0,54.61 270 top
C1  0.1uF  [0402-CAP]  29.08,41.58 180 bottom
C2  0.1uF  [0402-CAP]  76.96,20.45 90 bottom
C3  10uF  [0805]  48.26,44.04 0 top
C4  1uF  [0402-CAP]  18.67,44.96 90 top
C5  10uF  [0805]  51.54,44.04 180 top
C6  0.1uF  [0402-CAP]  31.72,26.95 270 top
C7  10uF  [0805]  15.88,45.97 270 top
C8  0.1uF  [0402-CAP]  26.39,26.11 90 top
C9  0.1uF  [0402-CAP]  29.21,29.82 0 top
C10  1uF  [0402-CAP]  24.89,52.07 180 top
C11  100uF 16V  [PANASONIC_D]  72.85,23.22 180 top
C12  10uF  [0805]  14.35,45.97 270 top
C13  0.1uF  [0402-CAP]  31.32,23.88 270 top
C14  0.1uF  [0402-CAP]  22.61,52.07 0 top
C15  0.1uF  [0402-CAP]  39.75,44.17 270 bottom
C16  10uF  [0805]  50.7,7.19 0 bottom
C17  0.1uF  [0402-CAP]  28.96,47.37 0 bottom
C18  0.1uF  [0402-CAP]  31.47,41.58 180 bottom
C19  0.1uF  [0402-CAP]  32.26,44.45 270 bottom
C20  10uF  [0805]  51.38,51.54 270 bottom
C21  0.1uF  [0402-CAP]  54.81,51.56 90 bottom
C22  0.1uF  [0402-CAP]  53.77,45.92 270 bottom
C23  10uF  [0805]  67.74,23.83 90 bottom
C24  0.1uF  [0402-CAP]  54.84,47.62 0 bottom
C25  10uF  [0805]  29.59,51.05 90 bottom
C26  10uF  [0805]  31.11,51.05 90 bottom
C27  0.1uF  [0402-CAP]  32.87,7.49 270 bottom
C28  0.1uF  [0402-CAP]  20.45,17.73 180 bottom
C29  10pF  [0402-CAP]  37.72,28.45 90 top
C30  10pF  [0402-CAP]  37.72,30.73 270 top
C31  10pF  [0402-CAP]  37.72,25.65 270 top
C32  10pF  [0402-CAP]  37.72,23.37 270 top
C33  2.2uF  [0402-CAP]  22.3,14.6 180 bottom
C34  10uF  [0805]  12.67,16.38 0 bottom
C35  0.1uF  [0402-CAP]  23.55,25.86 180 top
C36  2.2uF  [0402-CAP]  36.98,34.04 180 top
C37  0.1uF  [0402-CAP]  68.08,20.15 90 top
C38  10uF  [0805]  45.24,46 0 top
C39  0.1uF  [0402-CAP]  27.43,40.51 270 top
C40  0.1uF  [0402-CAP]  48.23,8.99 90 bottom
C41  0.1uF  [0402-CAP]  60.2,19.05 270 bottom
C42  1nF  [0402-CAP]  56.52,18.67 180 bottom
C43  0.1uF  [0402-CAP]  56.52,19.81 180 bottom
C44  0.1uF  [0402-CAP]  56.52,20.95 180 bottom
C45  0.1uF  [0402-CAP]  16.28,10.72 270 bottom
C46  10uF  [0805]  17.87,13.46 90 bottom
C47  0.1uF  [0402-CAP]  10.16,22.07 0 top
C48  10pF  [0402-CAP]  3.94,24.26 90 top
C49  0.1uF  [0402-CAP]  40.36,38.86 0 bottom
C50  0.1uF  [0402-CAP]  22.38,33.4 0 top
C51  0.1uF  [0402-CAP]  23.37,29.97 180 bottom
C52  0.1uF  [0402-CAP]  19.84,39.34 0 bottom
C53  10uF  [0805]  16.13,23.24 0 top
C54  0.1uF  [0402-CAP]  8.15,42.67 0 top
C55  0.1uF  [0402-CAP]  5.59,9.02 90 bottom
C56  0.1uF  [0402-CAP]  22.45,24.82 0 top
C57  1uF  [0402-CAP]  10.16,23.11 180 top
C58  10pF  [0402-CAP]  3.94,37.72 270 top
C59  10uF  [0805]  16.13,21.84 0 top
C60  10uF  [0805]  10.29,19.69 180 top
C61  1uF  [0402-CAP]  20.45,13.06 270 bottom
C62  0.22uF  [0402-CAP]  18.41,7.7 270 bottom
C63  0.22uF  [0402-CAP]  24.13,11.43 180 bottom
CAN  JST_SH_4  [JST_SH_4_SMD]  45.72,12.06 0 top
CHG  GRN  [LED-0603]  36.32,45.21 0 top
CHGIC  MP2615  [MP2615]  22.12,48.51 0 top
D1  [ADAFRUIT_SOD-123FL]  51.44,44.96 270 bottom
D2  [ADAFRUIT_SOD-123FL]  43.94,49.28 90 top
D3  [ADAFRUIT_SOD-123FL]  45.85,49.28 90 top
D9  [DO-214AA]  60.45,49.66 90 top
DSM2  JST_ZH_3  [JST_ZH_3]  72.26,3.68 0 top
E1  JST_SH_4  [JST_SH_4_SMD]  83.19,35.94 90 top
E2  JST_SH_4  [JST_SH_4_SMD]  79.12,35.94 90 top
E3  JST_SH_4  [JST_SH_4_SMD]  79.12,42.93 90 top
E4  JST_SH_4  [JST_SH_4_SMD]  83.19,42.93 90 top
EMU0  TPSQB1,27  [B1,27]  47.75,11.94 0 bottom
EMU1  TPSQB1,27  [B1,27]  46.86,13.46 0 bottom
FUD1  FIDUCIAL  [FIDUCIAL_40MIL]  13.97,8.76 0 top
FUD2  FIDUCIAL  [FIDUCIAL_40MIL]  69.85,8.76 0 top
FUD3  FIDUCIAL  [FIDUCIAL_40MIL]  69.85,48.89 0 top
FUD4  FIDUCIAL  [FIDUCIAL_40MIL]  74.93,5.46 0 bottom
FUD5  FIDUCIAL  [FIDUCIAL_40MIL]  74.68,51.05 0 bottom
FUD6  FIDUCIAL  [FIDUCIAL_40MIL]  18.16,5.59 0 bottom
G  GREEN  [BEAGLEBONE_BLUE_LED-0603]  22.35,5.46 180 top
GND  GHI2_TESTPAD/W_HOLE_1X1  [GHI2_TESTPAD/W_HOLE_1X1]  25.02,14.6 0 bottom
GP0  JST_SH_6  [JST_SH_6]  43.18,8.89 0 top
GP1  JST_SH_6  [JST_SH_6]  33.02,4.57 0 top
GPS  JST_SH_6  [JST_SH_6]  43.18,4.57 0 top
H1  TB6621FNG  [SSOP24]  72.72,15.14 90 top
H2  TB6621FNG  [SSOP24]  81.58,26.17 0 top
I2C  JST_SH_4  [JST_SH_4_SMD]  37.59,7.62 0 top
IMU  MPU-9250  [QFN24G-0.4-3X3MM]  29.21,27.3 90 top
J2  STRAWSON_EAGLE_LIB_SERVO_HEADERS_8X  [STRAWSON_EAGLE_LIB_3X8_0.1"_HEADER]  72.26,46.23 0 top
L1  6.8uH  [SRN6045]  47.6,49.47 90 bottom
L2  6.8uH  [SRN6045]  22.53,46.94 90 bottom
L3  3.6 uH  [8X8MM_INDUCTOR]  61.57,48.59 90 bottom
L4  120  [L0603]  16.26,7.62 90 bottom
L5  120  [L0603]  16.38,13.34 90 bottom
LIPO  BATTERY  [JST_XH_3-PIN]  40.54,51.51 0 top
M1  JST_ZH_2  [JST_ZH_2]  83.95,13.72 270 top
M2  JST_ZH_2  [JST_ZH_2]  80.01,13.72 270 top
M3  JST_ZH_2  [JST_ZH_2]  80.01,18.67 270 top
M4  JST_ZH_2  [JST_ZH_2]  83.95,18.67 270 top
MGT1  MOUNTING_HOLE  [MOUNTING_HOLE]  14.61,51.44 0 top
MGT2  MOUNTING_HOLE  [MOUNTING_HOLE]  80.64,48.26 0 top
MGT3  MOUNTING_HOLE  [MOUNTING_HOLE]  80.64,6.35 0 top
MGT4  MOUNTING_HOLE  [MOUNTING_HOLE]  14.61,3.17 0 top
MOD  SWITCH-MOMENTARY-2SMD-1101NE  [TACTILE-SWITCH-1101NE]  27.56,15.24 270 top
ON  BLUE  [BEAGLEBONE_BLUE_LED-0603]  12.57,45.34 0 top
OSC1  NZ2520SB-32.768KHZ-NSA3534C  [NZ2520S]  7.7,22.1 90 top
PAU  SWITCH-MOMENTARY-2SMD-1101NE  [TACTILE-SWITCH-1101NE]  32.64,15.24 270 top
POW  SWITCH-MOMENTARY-2SMD-1101NE  [TACTILE-SWITCH-1101NE]  17.4,15.24 270 top
PROT  S-8261  [SOT-236]  35.01,43.47 270 bottom
PWR  JST_SH_4  [JST_SH_4_SMD]  53.98,12.06 0 top
Q1  MOSFET-N  [SO08-TIGHT]  35.05,48.89 0 bottom
R  RED  [BEAGLEBONE_BLUE_LED-0603]  23.88,5.46 180 top
R1  47k  [0402-RES]  59.89,14.6 90 bottom
R2  1.5K  [0402-RES]  23.67,18.44 270 bottom
R3  1k  [0402-RES]  36.32,48.26 270 top
R4  0.1  [0603-RES]  27.69,50.8 90 bottom
R5  10k  [0402-RES]  19.81,44.96 90 top
R6  10k  [0402-RES]  20.95,44.96 270 top
R7  4.7k  [0402-RES]  23.24,44.96 90 top
R8  10k  [0402-RES]  22.1,44.96 270 top
R9  10K, DNP  [0402-RES]  10.92,42.16 270 top
R10  4.7k  [0402-RES]  26.92,24.46 0 top
R11  4.7k  [0402-RES]  26.92,23.29 180 top
R12  4.7k  [0402-RES]  37.59,7.16 180 bottom
R13  4.7k  [0402-RES]  34.54,7.16 180 bottom
R14  4.7k  [0402-RES]  58.72,14.6 270 bottom
R15  33  [0402-RES]  38.61,35.86 0 bottom
R16  100K  [0402-RES]  63.88,37.85 0 bottom
R17  100K  [0402-RES]  63.88,36.7 0 bottom
R18  1M  [0402-RES]  36.58,24.51 90 top
R19  47k  [0402-RES]  67.94,9.78 0 bottom
R20  1M  [0402-RES]  36.58,29.59 90 top
R21  240  [0402-RES]  24.59,2.79 270 top
R22  240  [0402-RES]  23.55,2.79 270 top
R23  1.5K  [0402-RES]  23.67,20.83 90 bottom
R24  4.7k  [0402-RES]  13.41,43.56 180 bottom
R25  4.7k  [0402-RES]  67.94,10.92 180 bottom
R26  10K  [0402-RES]  3.28,14.86 270 bottom
R27  150  [0402-RES]  31.24,47.37 0 bottom
R28  150  [0402-RES]  27.18,46.74 90 bottom
R29  240  [0402-RES]  33.02,48.26 90 top
R30  240  [0402-RES]  42.04,44.2 270 bottom
R31  240  [0402-RES]  34.54,48.26 90 top
R32  240  [0402-RES]  29.84,48.26 90 top
R33  240  [0402-RES]  31.37,48.26 90 top
R34  150  [0402-RES]  27.18,44.45 270 bottom
R35  10K  [0402-RES]  4.32,14.86 270 bottom
R36  4.7k  [0402-RES]  67.06,27.56 0 top
R37  4.7k  [0402-RES]  67.06,29.84 0 top
R38  4.7k  [0402-RES]  67.06,32.13 0 top
R39  4.7k  [0402-RES]  67.06,34.42 0 top
R40  4.7k  [0402-RES]  67.06,36.7 0 top
R41  4.7k  [0402-RES]  67.06,38.99 0 top
R42  4.7k  [0402-RES]  67.06,41.27 0 top
R43  4.7k  [0402-RES]  67.06,43.56 0 top
R44  1k  [0402-RES]  40.89,44.2 270 bottom
R45  47k  [0402-RES]  54.84,48.72 180 bottom
R46  1K  [0402-RES]  53.77,50.42 270 bottom
R47  100k  [0402-RES]  55.42,46.53 180 bottom
R48  10k  [0402-RES]  55.85,51.56 90 bottom
R49  65k  [0402-RES]  56.9,51.56 270 bottom
R50  4.7k  [0402-RES]  67.06,26.42 0 top
R51  4.7k  [0402-RES]  67.06,28.7 0 top
R52  4.7k  [0402-RES]  67.06,30.99 0 top
R53  4.7k  [0402-RES]  67.06,33.27 0 top
R54  10K  [0402-RES]  9.55,34.14 90 bottom
R55  10K  [0402-RES]  7.9,33.71 180 bottom
R56  10K  [0402-RES]  2.24,14.86 270 bottom
R57  10K  [0402-RES]  7.9,34.75 180 bottom
R58  1.5K  [0402-RES]  20.29,21.54 180 bottom
R59  4.7k  [0402-RES]  50.39,10.77 180 bottom
R60  10K  [0402-RES]  22.3,15.67 180 bottom
R61  1K  [0402-RES]  25.63,2.79 90 top
R62  1K  [0402-RES]  26.67,2.79 90 top
R63  1K  [0402-RES]  27.71,2.79 90 top
R64  1K  [0402-RES]  28.75,2.79 90 top
R65  10K  [0402-RES]  15.88,17.27 270 bottom
R66  10K  [0402-RES]  38.61,34.72 180 bottom
R67  10K  [0402-RES]  28.57,40.51 90 top
R68  10K  [0402-RES]  34.29,40.51 90 top
R69  10K  [0402-RES]  33.15,40.51 90 top
R70  10K  [0402-RES]  32,40.51 90 top
R71  10K  [0402-RES]  36.58,40.51 90 top
R72  10K  [0402-RES]  37.72,40.51 90 top
R73  10K  [0402-RES]  35.43,40.51 90 top
R74  10K  [0402-RES]  30.86,40.51 90 top
R75  10K  [0402-RES]  29.72,40.51 90 top
R76  33  [0402-RES]  39.62,29.57 180 bottom
R77  33  [0402-RES]  67.06,45.85 0 top
R78  33  [0402-RES]  17.91,39.88 270 top
R79  33  [0402-RES]  19.3,39.88 270 top
R80  33  [0402-RES]  16.51,39.88 270 top
R81  33  [0402-RES]  15.11,39.88 270 top
R82  33  [0402-RES]  13.72,39.88 270 top
R83  33  [0402-RES]  12.32,39.88 270 top
R84  33  [0402-RES]  10.92,39.88 270 top
R85  33  [0402-RES]  19.38,25.78 180 top
R86  33  [0402-RES]  19.38,26.82 180 top
R87  100K  [0402-RES]  12.57,20.45 270 top
R88  100K  [0402-RES]  13.61,20.45 270 top
R89  1K, DNP  [0402-RES]  23.39,27.74 0 bottom
R90  1K  [0402-RES]  7.75,20.07 180 top
R91  240  [0402-RES]  21.34,23.77 180 top
R92  33  [0402-RES]  19.38,27.86 180 top
R93  33  [0402-RES]  23.24,36.45 180 top
R94  10K  [0402-RES]  38.61,33.58 180 bottom
R95  100K  [0402-RES]  21.21,6.73 180 bottom
R96  33  [0402-RES]  19.38,28.91 180 top
R97  33  [0402-RES]  19.38,29.95 180 top
R98  10K  [0402-RES]  16.51,42.16 270 top
R99  10K  [0402-RES]  15.11,42.16 270 top
R100  33  [0402-RES]  19.38,30.99 180 top
R101  10K  [0402-RES]  13.72,42.16 270 top
R102  10K  [0402-RES]  12.32,42.16 270 top
R103  10K  [0402-RES]  17.91,42.16 270 top
R104  120, DNP  [0603-RES]  41.81,11.91 90 bottom
R105  10K  [0402-RES]  19.3,42.16 270 top
R106  1.5K  [0402-RES]  23.24,37.59 180 top
R107  .1, 0805  [R0805]  16.15,45.09 90 bottom
R108  1K, DNP  [0402-RES]  23.39,28.88 0 bottom
R109  4.7k  [0402-RES]  57.56,14.6 90 bottom
R110  4.7k  [0402-RES]  56.39,14.6 270 bottom
R111  0  [0402-RES]  56.52,17.53 0 bottom
R112  0  [0603-RES]  7.62,36.93 0 bottom
R113  100K  [0402-RES]  63.88,29.84 0 bottom
R115  100K  [0402-RES]  63.88,30.99 0 bottom
R116  100K  [0402-RES]  67.06,44.7 0 top
R118  100K  [0402-RES]  63.88,28.7 180 bottom
R119  0, DNP  [0603-RES]  22.58,12.95 180 bottom
R120  100K  [0402-RES]  67.06,40.13 0 top
R121  0, DNP  [0603-RES]  17.91,10.34 270 bottom
R122  100K  [0402-RES]  67.06,42.42 0 top
R123  33  [0402-RES]  19.38,32.03 180 top
R124  33  [0402-RES]  19.38,33.07 180 top
R125  100K  [0402-RES]  67.06,35.56 180 top
R127  100K  [0402-RES]  67.06,37.85 180 top
R129  100K  [0402-RES]  63.88,35.56 0 bottom
R131  100K  [0402-RES]  63.88,32.13 0 bottom
R135  100K  [0402-RES]  63.88,34.42 0 bottom
R140  100K  [0402-RES]  63.88,33.27 180 bottom
R143  100K  [0402-RES]  56.03,41.71 90 bottom
R149  0  [0402-RES]  8.15,41.63 180 top
R150  0  [0402-RES]  38.61,32.51 0 bottom
R156  33  [0402-RES]  19.33,13.06 270 bottom
R158  10K  [0402-RES]  59.05,19.18 90 bottom
RST  SWITCH-MOMENTARY-2SMD-1101NE  [TACTILE-SWITCH-1101NE]  22.48,15.24 270 top
S1.1  JST_SH_6  [JST_SH_6]  53.34,4.57 0 top
S1.2  JST_SH_6  [JST_SH_6]  53.34,8.89 0 top
SD  SWITCH-MOMENTARY-2SMD-1101NE  [TACTILE-SWITCH-1101NE]  71.98,51.82 180 top
SIP  OSD3358  [BEAGLEBONE_BLUE_OSD3358]  51.82,28.96 90 top
TCK  TPSQB1,27  [B1,27]  48.64,13.46 0 bottom
TDI  TPSQB1,27  [B1,27]  50.42,13.46 0 bottom
TDO  TPSQB1,27  [B1,27]  49.53,11.94 0 bottom
TMS  TPSQB1,27  [B1,27]  51.31,11.94 0 bottom
TP1  TPSQB1,27  [B1,27]  58.93,42.06 180 bottom
TP5  TPB0,65  [BEAGLEBONE_BLUE_B0,65]  49.5,22.28 0 bottom
TP12  TPSQB1,27  [B1,27]  70.51,2.64 0 bottom
TRSTN  TPSQB1,27  [B1,27]  52.2,13.46 0 bottom
U1  TCAN1051HV  [BEAGLEBONE_BLUE_D8]  37.24,11.68 180 bottom
U2  SN74LV1T126DBVR  [BEAGLEBONE_BLUE_SOT23-5]  23.34,40.59 0 top
U3  TPD4S012DRY  [SON-6(TI)-DRY]  8.03,40.34 0 top
U4  TPD4S012DRY  [SON-6(TI)-DRY]  3.94,9.02 90 bottom
U5  24LC_32AT-I/OT  [SOT95P290X145-5N]  20.94,19.63 0 bottom
U6  SN74LVC1G07_DCK_5  [BEAGLEBONE_BLUE_DCK5]  37.21,12.75 0 top
U7  WL1835MODGBMOCT  [MOC-100(TI)]  11.33,30.86 180 top
U8  TPS2105_DBV_5  [DBV5]  20.7,9.91 90 bottom
U9  TXS0108ERGYR  [R-PVQFN-N20(TI)]  21.84,35.56 90 bottom
U10  TXS0108ERGYR  [R-PVQFN-N20(TI)]  23.24,29.24 270 top
U13  EMMC  [MICRON_EMMC_153]  31.62,34.44 0 bottom
U$2  [BATTERY_INDICATOR_LEFT]  32.26,45.21 0 top
U$5  [XYZ_BIG]  32.23,31.29 90 top
UT0  JST_SH_4  [JST_SH_4_SMD]  66.42,3.3 0 top
UT1  JST_SH_4  [JST_SH_4_SMD]  66.42,7.62 0 top
UT5  JST_SH_4  [JST_SH_4_SMD]  74.55,7.62 0 top
WIFI  GREEN  [BEAGLEBONE_BLUE_LED-0603]  22.83,22.73 90 top
WP  GHI2_TESTPAD/W_HOLE_1X1  [GHI2_TESTPAD/W_HOLE_1X1]  25.02,17.14 0 bottom
X2  SCHA5B0200  [SCHA5B0200]  1.4,25.02 90 bottom
X3  USB1  [USB_HOST_HORIZONTAL_W/CHASSIS_GND]  -2.54,9.02 270 top
X4  10118192-0001LF  [10118192-0001LF(MICRO-USB-B-AMPHENOL-FCI)]  1.45,38.35 90 bottom
Y1  24 MHz  [CRYSTAL_5X3.2MM]  34.16,29.59 90 top
Y2  32.768kHz  [CRYSTAL_3.2X1.5]  34.54,24.51 90 top

## Library data of the parts
0 1-3 5VREG D1-D3 G GND J2 ON R SIP TP5 U2 WIFI WP = BeagleBone_Blue
6VREG ADC BAL BMP BOARD C1 C2 C4 C6 C8-C10 C13-C15 C17-C19 C21 C22 C24 C27-C52 C54-C58 C61-C63 CAN CHGIC D9 DSM2 E1-E4 GP0 GP1 GPS I2C L3 LIPO M1-M4 PROT PWR Q1 R1-R3 R5-R103 R105 R106 R108-R111 R113 R115 R116 R118 R120 R122-R125 R127 R129 R131 R135 R140 R143 R149 R150 R156 R158 S1.1 S1.2 U$2 U$5 UT0 UT1 UT5 = Strawson_Eagle_Lib
12V FUD1-FUD6 = GHI
ANT1 ANT2 X2 X4 = GHI-Connectors
B0 B1-B3 CHG = SparkFun-LED
C3 C5 C7 C12 C16 C20 C23 C25 C26 C53 C59 C60 = SparkFun-Capacitors
C11 = adafruit
EMU0 EMU1 TCK TDI TDO TMS TP1 TP12 TRSTN = testpad
H1 H2 = SparkFun
IMU = Strawson_Eagle_Lib; MPN: MPU-9250
L1 L2 = SparkFun-Passives; PROD_ID: NDUC-11627
L4 L5 = Seeed-OPL-Inductor
MGT1-MGT4 = BeagleBoneBlack
MOD PAU POW RST SD = SparkFun-Electromechanical; PROD_ID: SWCH-00815
OSC1 U3 U4 U7 U9 U10 U13 = GHI-IC
R4 R104 R112 R119 R121 = SparkFun-Resistors
R107 = rcl
U1 = BeagleBone_Blue; DATASHEETURL: http://www.ti.com/lit/ds/symlink/tcan1051hv.pdf; DESCRIPTION: CAN Transceiver; FAMILY_NAME: CAN Transceiver; GENERIC_PART_NUMBER: TCAN1051HV; INDUSTRY_STD_PKG_TYPE: SOIC; MANUFACTURER: Texas Instruments; MANUFACTURER_PART_NUMBER: TCAN1051HVD; PACKAGE_DESIGNATOR: D; PIN_COUNT: 8; VENDOR: Texas Instruments
U5 = Microchip-24LCxxx; MPN: 24LC32AT-I/OT; OC_FARNELL: 1700993; OC_NEWARK: 08P0113; PACKAGE: SOT-23-5; SUPPLIER: MICROCHIP
U6 = BeagleBone_Blue; DATASHEETURL: http://www.ti.com/lit/gpn/SN74LVC1G07; DESCRIPTION: Single Buffer/Driver With Open-Drain Output; FAMILY_NAME: LL BUFFER AND DRIVER WITH OPEN-DRAIN OUTPUT; GENERIC_PART_NUMBER: SN74LVC1G07; INDUSTRY_STD_PKG_TYPE: SC70; MANUFACTURER: Texas Instruments; MANUFACTURER_PART_NUMBER: sn74lvc1g07_dck_5; PACKAGE_DESIGNATOR: DCK; PIN_COUNT: 5; VENDOR: Texas Instruments
U8 = BeagleBone_Blue; DATASHEETURL: http://www.ti.com/lit/gpn/TPS2105; DESCRIPTION: 2.7-5.5V Dual In/Single Out MOSFET, 0.5A Main/0.1A Aux Input, Act-High Enable, Industrial Temp.; FAMILY_NAME: POWER MULTIPLEXER (MUX); GENERIC_PART_NUMBER: TPS2105; INDUSTRY_STD_PKG_TYPE: SOT-23; MANUFACTURER: Texas Instruments; MANUFACTURER_PART_NUMBER: tps2105_dbv_5; PACKAGE_DESIGNATOR: DBV; PIN_COUNT: 5; VENDOR: Texas Instruments
X3 Y1 Y2 = GHI2

## Nets
3.3V: BMP.2 BMP.6 BMP.8 C2.2 C8.1 C9.2 C13.1 C16.1 C27.1 C28.1 C34.2 C35.2 C37.1 C38.1 C39.1 C40.1 C41.1 C49.2 C51.2 C53.1 C56.1 C59.1 CAN.2 DSM2.P$1 E1.2 E2.2 E3.2 E4.2 GP0.2 GP1.2 H1.20 H2.20 I2C.2 IMU.1 IMU.8 IMU.13 IMU.22 PWR.3 R2.2 R10.1 R11.2 R12.2 R13.1 R23.2 R26.2 R35.2 R54.2 R55.2 R56.2 R57.2 R58.2 R60.2 R65.2 R66.2 R67.2 R68.2 R69.2 R70.2 R71.2 R72.2 R73.2 R74.2 R75.2 R94.2 R109.1 R116.2 R118.2 R120.2 R122.2 R140.2 S1.1.2 S1.2.2 SIP.U20 SIP.V20 U1.5 U5.4 U7.46 U7.47 U9.19 U10.19 U13.C6 U13.E6 U13.F5 U13.J10 U13.K9 U13.M4 U13.N4 U13.P3 U13.P5 UT0.2 UT1.2 UT5.2 X2.4
5.0V [power]: 5VREG.3 C5.1 C63.1 GPS.5 L1.2 PWR.4 R95.2 R119.2 SIP.Y5 SIP.Y6 U8.1 U8.5
32.768KHZ: OSC1.3 U7.36
AIN0: ADC.3 SIP.B6
AIN1: ADC.4 SIP.C7
AIN2: ADC.5 SIP.B7
AIN3: ADC.6 SIP.A7
ALT.BUFF.OE: R93.2 R106.2 U2.1 U9.10 U10.10
ANT1_A: C48.2 U7.32
ANT1_B: ANT1.SIG C48.1
ANT2_A: C58.2 U7.18
ANT2_B: ANT2.SIG C58.1
BATT_LED_1: B0.A SIP.U12
BATT_LED_2: B1.A R143.2 SIP.T5
BATT_LED_3: B2.A SIP.V6
BATT_LED_4: B3.A SIP.T11
BATT_MID: LIPO.P$2 R27.1 R30.1 R44.1
BATT_MINUS: BAL.5 BAL.6 C1.2 C15.1 C18.1 C19.2 LIPO.P$3 PROT.2 PROT.6 Q1.1 Q1.2 Q1.3
BT_AUD_CLK: R124.1 U10.1
BT_AUD_FSYNC: R123.1 U10.3
BT_AUD_IN: R97.1 U10.5
BT_AUD_OUT: R100.1 U10.4
BT_EN: SIP.K17 U9.18
BT_EN_1V8: R88.1 U7.41 U9.3
BT_HCI_CTS: R86.1 U10.8
BT_HCI_RTS: R85.1 U10.9
BT_HCI_RX: R96.1 U10.6
BT_HCI_TX: R92.1 U10.7
CANH: CAN.3 R104.1 U1.7
CANL: CAN.4 R104.2 U1.6
CGND: MGT1.P$1 MGT2.P$1 MGT3.P$1 MGT4.P$1 R107.2 X2.CGND1 X2.CGND2 X2.CGND3 X2.CGND4 X2.CGND5 X2.CGND6 X3.5 X3.6 X4.CGND1 X4.CGND2 X4.CGND3 X4.CGND4 X4.CGND5 X4.CGND6
CHG_EN: CHGIC.6 R7.2 R8.1
CO: BAL.8 R7.1
DCAN1_RX: SIP.E17 U1.4
DCAN1_SILENT: SIP.M16 U1.8
DCAN1_TX: SIP.E18 U1.1
DO: PROT.1 Q1.4
EMMC_RST: R94.1 SIP.R14 U13.K5
EQEP_0A: E1.3 SIP.B12
EQEP_0B: E1.4 SIP.C13
EQEP_1A: E2.3 R16.2 SIP.V2
EQEP_1B: E2.4 R17.2 SIP.V3
EQEP_2A: E3.3 SIP.T12
EQEP_2B: E3.4 SIP.R12
GND [ground]: 5VREG.4 5VREG.5 5VREG.6 5VREG.7 5VREG.8 6VREG.3 12V.OUT ADC.1 ANT1.GND1 ANT1.GND2 ANT2.GND1 ANT2.GND2 BMP.1 BMP.5 BMP.7 C2.1 C3.2 C4.1 C5.2 C6.2 C7.2 C8.2 C9.1 C10.1 C11.- C12.2 C13.2 C16.2 C20.1 C21.1 C23.1 C24.1 C25.2 C26.2 C27.2 C28.2 C33.2 C34.1 C35.1 C36.2 C37.2 C38.2 C39.2 C40.2 C41.2 C45.2 C46.2 C47.2 C49.1 C50.2 C51.1 C52.2 C53.2 C54.2 C55.2 C56.2 C57.1 C59.2 C60.1 C61.1 C62.2 C63.2 CAN.1 CHGIC.8 CHGIC.16 D1.A D9.A DSM2.P$2 E1.1 E2.1 E3.1 E4.1 GND.P$1 GP0.1 GP1.1 GPS.2 GPS.6 H1.3 H1.4 H1.9 H1.10 H1.18 H2.3 H2.4 H2.9 H2.10 H2.18 I2C.1 IMU.9 IMU.18 IMU.20 J2.P$13 J2.P$14 J2.P$15 J2.P$16 J2.P$17 J2.P$18 J2.P$23 J2.P$24 L4.1 MOD.1 OSC1.2 PAU.1 POW.1 PWR.1 PWR.2 Q1.5 Q1.6 Q1.7 Q1.8 R6.1 R8.2 R14.2 R16.1 R17.1 R21.2 R22.2 R24.2 R25.2 R29.2 R31.2 R32.2 R33.2 R46.1 R47.1 R48.1 R50.2 R51.2 R52.2 R53.2 R59.1 R61.1 R62.1 R63.1 R64.1 R87.2 R88.2 R89.2 R91.2 R95.1 R106.1 R107.1 R108.2 R110.2 R113.1 R115.1 R125.1 R127.1 R129.1 R131.1 R135.1 R143.1 R150.2 R158.2 RST.1 S1.1.1 S1.2.1 SD.1 SIP.A1 SIP.A18 SIP.E19 SIP.E20 SIP.F8 SIP.F19 SIP.G8 SIP.G9 SIP.G11 SIP.G12 SIP.G19 SIP.H6 SIP.H7 SIP.H8 SIP.H9 SIP.H10 SIP.H12 SIP.H19 SIP.J6 SIP.J7 SIP.J8 SIP.J9 SIP.J10 SIP.J11 SIP.J19 SIP.J20 SIP.K7 SIP.K9 SIP.K10 SIP.K11 SIP.K19 SIP.L10 SIP.L11 SIP.L12 SIP.L13 SIP.L19 SIP.M6 SIP.M7 SIP.M8 SIP.M9 SIP.M10 SIP.M12 SIP.M14 SIP.M19 SIP.N7 SIP.N10 SIP.N11 SIP.N14 SIP.N19 SIP.N20 SIP.P19 SIP.P20 SIP.R19 SIP.R20 SIP.T19 SIP.T20 SIP.U19 SIP.V1 SIP.V18 SIP.V19 SIP.W2 SIP.W3 SIP.W5 SIP.W6 SIP.W7 SIP.W8 SIP.W9 SIP.W10 SIP.W11 SIP.W12 SIP.W13 SIP.W14 SIP.W15 SIP.W16 SIP.W17 SIP.W18 SIP.W19 SIP.W20 SIP.Y7 SIP.Y10 SIP.Y12 SIP.Y15 SIP.Y18 TP12.TP U1.2 U2.3 U3.4 U4.4 U5.2 U6.3 U7.1 U7.7 U7.9 U7.15 U7.16 U7.17 U7.19 U7.20 U7.23 U7.24 U7.28 U7.29 U7.30 U7.31 U7.33 U7.34 U7.35 U7.37 U7.39 U7.44 U7.45 U7.48 U7.49 U7.54 U7.55 U7.59 U7.61 U7.63 U7.64 U7.G1 U7.G2 U7.G3 U7.G4 U7.G5 U7.G6 U7.G7 U7.G8 U7.G9 U7.G10 U7.G11 U7.G12 U7.G13 U7.G14 U7.G15 U7.G16 U7.G17 U7.G18 U7.G19 U7.G20 U7.G21 U7.G22 U7.G23 U7.G24 U7.G25 U7.G26 U7.G27 U7.G28 U7.G29 U7.G30 U7.G31 U7.G32 U7.G33 U7.G34 U7.G35 U7.G36 U8.2 U9.11 U9.TP U10.11 U10.TP U13.C4 U13.E7 U13.G5 U13.H10 U13.K8 U13.N2 U13.N5 U13.P4 U13.P6 UT0.1 UT1.1 UT5.1 X2.6 X2.GND X4.GND
GNDA_ADC: C42.2 C43.2 C44.2 SIP.A6 SIP.A9 SIP.E8
GPIO1_17: GP0.4 SIP.V14
GPIO1_25: GP0.3 SIP.U16
GPIO3_1: GP1.4 SIP.H17
GPIO3_2: GP1.3 SIP.J15
GPIO3_17: GP0.6 SIP.C12
GPIO3_20: GP0.5 SIP.D13
I2C0_SCL: R23.1 SIP.C16 SIP.C20 U5.1
I2C0_SDA: R2.1 SIP.C17 SIP.C19 U5.3
I2C1_SCL: I2C.3 R12.1 SIP.A16
I2C1_SDA: I2C.4 R13.2 SIP.B16
I2C2_SCL: BMP.4 IMU.23 R11.1 SIP.D17
I2C2_SDA: BMP.3 IMU.24 R10.2 SIP.D18
IMU_INT: IMU.12 SIP.A14
L3: B2.C R33.1
L4: B3.C R32.1
LDO_PGOOD: SIP.B5 SIP.B20
LED_GRN: G.A GP1.6 SIP.T7
LED_RED: GP1.5 R.A SIP.R7
MCASP0_ACLKR: SIP.U18 U10.20
MCASP0_AXR0: SIP.T16 U10.17
MCASP0_AXR1: SIP.V17 U10.16
MCASP0_FSR: SIP.V12 U10.18
MDIR_1A: H1.21 SIP.T13
MDIR_1B: H1.22 SIP.U17
MDIR_2A: H1.17 SIP.R13
MDIR_2B: H1.16 R140.1 SIP.V4
MDIR_3A: H2.21 R118.1 SIP.R4
MDIR_3B: H2.22 R77.1 R116.1 SIP.R3
MDIR_4A: H2.17 R113.2 SIP.R1
MDIR_4B: H2.16 R115.2 SIP.R2
MMC1_CLK: R15.2 R66.1 U13.M6
MMC1_CMD: R67.1 SIP.V9 U13.M5
MMC1_DAT0: R68.1 SIP.U7 U13.A3
MMC1_DAT1: R69.1 SIP.V7 U13.A4
MMC1_DAT2: R70.1 SIP.R8 U13.A5
MMC1_DAT3: R71.1 SIP.T8 U13.B2
MMC1_DAT4: R72.1 SIP.U8 U13.B3
MMC1_DAT5: R73.1 SIP.V8 U13.B4
MMC1_DAT6: R74.1 SIP.R9 U13.B5
MMC1_DAT7: R75.1 SIP.T9 U13.B6
MMC2_CLK: R76.1 U9.13
MMC2_CMD: SIP.J16 U9.12
MMC2_DAT0: SIP.J17 U9.14
MMC2_DAT1: SIP.J18 U9.15
MMC2_DAT2: SIP.K15 U9.16
MMC2_DAT3: SIP.H16 U9.17
MODE_BTN: MOD.2 SIP.U6
MOT1A: H1.1 H1.2 M1.P$2
MOT1B: H1.5 H1.6 M1.P$1
MOT2A: H1.11 H1.12 M2.P$1
MOT2B: H1.7 H1.8 M2.P$2
MOT3A: H2.1 H2.2 M3.P$1
MOT3B: H2.5 H2.6 M3.P$2
MOT4A: H2.11 H2.12 M4.P$2
MOT4B: H2.7 H2.8 M4.P$1
MOT_STBY: H1.19 H2.19 SIP.D14
N$1: J2.P$1 R36.2
N$2: R57.1 SIP.G17 X2.5
N$3: G.C R22.1
N$4: BAL.2 C17.1 C18.2 R30.2
N$5: R26.1 SIP.F17 X2.2
N$6: R21.1 R.C
N$7: OSC1.1 R90.1
N$8: BAL.1 C17.2 R28.2
N$10: 6VREG.7 C21.2
N$11: C15.2 PROT.5 R44.2
N$12: SIP.C6 SIP.D19 TP5.TP
N$14: C6.1 IMU.10
N$15: C14.1 CHGIC.15
N$16: 5VREG.2 D1.C L1.1
N$17: CHG.C R3.2
N$18: CHGIC.11 R3.1
N$20: R91.1 WIFI.C
N$24: BAL.4 C19.1
N$25: J2.P$2 R37.2
N$26: C30.1 R20.2 SIP.M20 Y1.2
N$27: C29.1 R20.1 SIP.K20 Y1.1
N$28: R58.1 U5.5 WP.P$1
N$29: BAL.7 C1.1 R34.2
N$30: J2.P$3 R38.2
N$31: C29.2 C30.2 SIP.L20
N$32: C31.1 R18.2 SIP.H20 Y2.P$2
N$33: C32.2 R18.1 SIP.F20 Y2.P$1
N$34: C31.2 C32.1 SIP.G20
N$35: EMU0.TP SIP.B14
N$36: EMU1.TP SIP.C14
N$37: SIP.A11 TDO.TP
N$38: J2.P$4 R39.2
N$39: SIP.A12 TCK.TP
N$40: SIP.B11 TDI.TP
N$41: SIP.C11 TMS.TP
N$42: R59.2 SIP.B10 TRSTN.TP
N$43: R100.2 U7.57
N$45: R76.2 SIP.L15
N$47: 0.C R61.2
N$48: B1.C R29.1
N$49: B0.C R31.1
N$50: BAL.3 R27.2
N$51: J2.P$5 R40.2
N$52: J2.P$6 R41.2
N$53: 6VREG.2 C22.1
N$54: J2.P$19 R42.2
N$55: C14.2 CHGIC.1 L2.1
N$56: J2.P$20 R43.2
N$57: 1.C R62.2
N$58: 2.C R63.2
N$59: 3.C R64.2
N$60: 6VREG.1 C22.2 D9.C L3.1
N$61: 6VREG.4 R47.2
N$62: C23.2 J2.P$7 J2.P$8 J2.P$9 J2.P$10 J2.P$11 J2.P$12 J2.P$21 J2.P$22 L3.2 R49.2
N$63: 6VREG.5 R45.2
N$65: 6VREG.6 R48.2 R49.1
N$66: C24.2 R45.1
N$67: CHGIC.10 L2.2 R4.2
N$69: C10.2 CHGIC.14
N$70: R54.1 SIP.G15 X2.8
N$71: CHGIC.13 R5.1 R6.2
N$74: R56.1 SIP.G18 X2.3
N$75: R65.1 SIP.C15 X2.CD
N$77: R55.1 SIP.G16 X2.7
N$79: 5VREG.1 C3.1 D2.C D3.C
N$81: C36.1 U13.C2
N$85: R15.1 SIP.U9
N$86: R135.2 SIP.U4
N$103: R9.2 R84.2 U7.14
N$104: R83.2 U7.13
N$105: R82.2 U7.12
N$106: R81.2 U7.11
N$107: R80.2 U7.10
N$108: R78.2 U7.8
N$110: C42.1 C43.1 R111.2 SIP.B9
N$111: R79.2 U7.6
N$112: R85.2 U7.50
N$113: R86.2 U7.51
N$114: R92.2 U7.52
N$115: R109.2 R110.1 SIP.C9
N$116: R96.2 U7.53
N$121: R149.1 SIP.P15
N$126: R150.1 SIP.P17
N$128 [power]: L4.2 X3.4
N$129: R156.1 SIP.T18
N$130 [power]: L5.2 X3.1
N$131: R158.1 SIP.B4
N$146: R97.2 U7.56
N$148: R123.2 U7.58
N$149: R124.2 U7.60
NTE: R35.1 SIP.F18 X2.1
PAUSE_BTN: PAU.2 SIP.T6
PMIC_INT: SIP.B18 SIP.B19
PMIC_NWAKEUP: SIP.A19 SIP.C5
PMIC_PGOOD: SIP.A20 SIP.B15 U6.2
POWER_BTN: POW.2 SIP.D20
PRU_E_A: E4.3 SIP.V13
PRU_E_B: E4.4 SIP.U13
PWM_1A: H1.23 SIP.U14
PWM_1B: H1.15 SIP.T14
PWM_2A: H2.23 SIP.U10
PWM_2B: H2.15 SIP.T10
PWR_LED: ON.C R24.1
RESET: C33.1 R60.1 RST.2 SIP.A10 U6.4
SD_BOOT: R77.2 SD.2
SERVO_EN: 6VREG.8 R46.2 SIP.U3
SPI1_MISO: S1.1.4 S1.2.4 SIP.B13
SPI1_MOSI: S1.1.3 S1.2.3 SIP.D12
SPI1_SCK: S1.1.5 S1.2.5 SIP.A13
SPI1_SS1: S1.1.6 SIP.H18
SPI1_SS2: S1.2.6 SIP.C18
SVO1: R36.1 R50.1 SIP.U5
SVO2: R37.1 R51.1 SIP.V5
SVO3: R38.1 R52.1 SIP.R5
SVO4: R39.1 R53.1 SIP.R6
SVO5: R40.1 R125.2 SIP.T3
SVO6: R41.1 R127.2 SIP.T4
SVO7: R42.1 R120.1 SIP.T1
SVO8: R43.1 R122.1 SIP.T2
SYS_5V [power]: C62.1 R121.2 SIP.W4 SIP.Y4 TP1.TP U1.3 U8.3
UART0_RX: SIP.E15 UT0.3
UART0_TX: SIP.E16 UT0.4
UART1_RX: SIP.D16 UT1.3
UART1_TX: SIP.D15 UT1.4
UART2_RX: GPS.3 SIP.A17
UART2_TX: GPS.4 SIP.B17
UART3_CTSN: R89.1 SIP.M17 U10.12
UART3_RTSN: R108.1 SIP.M18 U10.13
UART3_RX: SIP.L17 U10.14
UART3_TX: SIP.L16 U10.15
UART4_RX: DSM2.P$3 SIP.T17
UART5_RX: R131.2 SIP.U2 UT5.3
UART5_TX: R129.2 SIP.U1 UT5.4
USB0_D_N: SIP.N18 U3.2 X4.D-
USB0_D_P: SIP.N17 U3.1 X4.D+
USB0_ID: SIP.P16 U3.3 X4.ID
USB0_VBUS: C54.1 R112.2 R149.2 U3.6 X4.VBUS
USB1_D_N: SIP.R18 U4.2 X3.2
USB1_D_P: SIP.R17 U4.1 X3.3
USB1_VBUS: C45.1 C46.1 C55.1 C61.2 L5.1 R119.1 R121.1 R156.2 U4.6 U8.4
USB_DC [power]: R112.1 SIP.Y8 SIP.Y9
USR_LED0: 0.A SIP.V15
USR_LED1: 1.A SIP.U15
USR_LED2: 2.A SIP.T15
USR_LED3: 3.A SIP.V16
V_BATT: 6VREG.9 C11.+ C20.2 C25.1 C26.1 CHGIC.9 D2.A H1.13 H1.14 H1.24 H2.13 H2.14 H2.24 LIPO.P$1 R4.1 R19.1 R28.1 R34.1
V_DIV_BAT: R19.2 R25.1 SIP.A8
V_DIV_DC: R1.2 R14.1 SIP.B8
VCC: 12V.IN C7.1 C12.1 CHG.A CHGIC.2 D3.A R1.1
VCC_CHG: C4.2 CHGIC.3 R5.2
VDD_1V8: C47.1 C50.1 C52.1 C57.2 C60.2 OSC1.4 R9.1 R90.2 R98.1 R99.1 R101.1 R102.1 R103.1 R105.1 SIP.D10 SIP.E9 SIP.N16 SIP.R16 U2.5 U7.38 U9.2 U10.2
VDD_3V3AUX: ON.A SIP.Y11
VDD_ADC: ADC.2 C44.1 R111.1 SIP.A4 SIP.A5 SIP.D8
VDD_RTC: SIP.E14 U6.5
VIN_BAT_0: SIP.Y2
VIN_BAT_1: SIP.Y3
WIFI_LED: SIP.A15 WIFI.A
WL_BT_OE: R93.1 SIP.L18
WL_EN: SIP.K18 U9.20
WL_EN_1V8: R87.1 U7.40 U9.1
WL_IRQ: R84.1 U2.2
WL_SDIO_CLK: R78.1 R103.2 U9.8
WL_SDIO_CMD: R79.1 R105.2 U9.9
WL_SDIO_D0: R80.1 R98.2 U9.7
WL_SDIO_D1: R81.1 R99.2 U9.6
WL_SDIO_D2: R82.1 R101.2 U9.5
WL_SDIO_D3: R83.1 R102.2 U9.4
WLAN_IRQ: SIP.K16 U2.4

## Tracks (layer width: path | path; a pad name or v marks a point on that pad's centre or on a via)
3.3V  (via drill 0.25 pad 0.46, 0.5, 0.81 pad 0.41)
  Top 0.152: R10.1 v25.65,24.46 | C37.1 68.1,19.58 v68.76,19.58 | IMU.22 27.28,27.11 26.87,26.7 26.87,25.7 26.72,25.55 C8.1 | IMU.1 28.21,25.39 v27.96,25.15 | IMU.8 31.11,26.7 31.24,26.57 31.24,25.81 30.91,25.48 v30.91,25.15 | IMU.13 30.21,29.2 30.07,29.34 29.92,29.34 29.77,29.49 C9.2 | IMU.13 30.23,28.83 | IMU.13 31.77,28.8 32.54,28.04 32.54,26.01 v32.79,25.76 | R11.2 25.35,23.29 24.38,24.26 v24.38,24.89
  Top 0.254: CAN.2 45.18,12.43 45.52,12.09 v46.13,12.09 | 52.45,13.32 PWR.3 52.44,12.28 v52.78,11.94 | U10.19 v24.97,31.57 | C35.2 22.58,25.86 v22.2,25.48 | C56.1 v21.18,24.82 | v28.07,42.29 27.43,41.66 C39.1 R67.2 R75.2 R74.2 R70.2 R69.2 R68.2 R73.2 R71.2 R72.2 37.72,41.73 37.34,42.11 v36.73,42.11 | R122.2 68.25,42.42 68.56,42.72 v68.56,42.98 68.56,42.77 | R116.2 68.1,44.7 68.48,45.09 v68.48,45.87 | R120.2 68.12,40.13 68.5,40.51 v68.5,40.79 | S1.1.2 57.35,4.59 57.33,4.61 v57.33,7.7 57.33,8.88 S1.2.2 | v47.17,7.7 v47.18,7.71 GP0.2 | C13.1 30.96,24.43 30.75,24.65 BMP.8 30.41,24.2 v30.63,23.98 | C8.1 v25.45,25.55 | BMP.6 29.11,24.12 v29.26,23.98 29.26,23.88 29.76,23.37 BMP.2 | E3.2 E4.2 v83.11,42.39 | GP1.2 37.05,4.6 37.03,4.62 v37.03,6.15 37.03,8.87 I2C.2 | E2.2 v80.24,35.41 81.91,35.41 E1.2 | UT5.2 v74.02,6.98 | UT1.2 v65.89,7.7 | UT0.2 v65.89,5.77
  Top 0.406: C38.1 44.35,45.99 v44.35,44.83 | H1.20 v70.61,14.16 v70.61,14.17 | 15.24,21.77 v15.24,20.32 | H2.20 80.61,28.95 80.24,28.57 v79.78,28.57
  Bottom 0.152: R56.2 v2.23,13.54 | R26.2 v3.28,13.54 | U13.J10 30.85,33.69 v31.09,33.93 30.87,33.72 U13.K9 | U13.F5 32.37,35.19 | 32.37,35.19 U13.E6 32.61,35.93 v32.61,36.2 32.61,36.45 U13.C6 | 32.37,35.19 v32.16,34.98 | U13.P5 U13.N4 | U13.P3 U13.N4 | U13.N4 U13.M4 33.37,32.9 v33.35,32.92 | R140.2 v65.15,33.27 | R118.2 v65.15,28.7 | R109.1 57.56,14.45 57.71,14.6 v58.14,14.6 | v59.44,20.45 59.66,20.22 59.66,19.76 59.82,19.61 C41.1 | C27.1 v32.21,8.05 | C40.1 v48.9,8.43
  Bottom 0.254: C2.2 v76.2,21.01 | X2.4 2.66,16.89 v2.16,16.38 | R35.2 v4.32,13.54 | R65.2 v15.88,16 | R23.2 23.57,21.49 v22.45,21.49 | R58.2 20.9,21.49 v21.69,21.49 | 8.51,34.7 R54.2 10.19,34.7 10.46,34.42 10.46,33.2 10.29,33.02 9.93,33.02 8.13,31.22 8.13,29.82 6.86,28.55 6.86,22.45 8.81,20.5 9.75,20.5 13.59,24.33 18.47,24.33 v18.8,24.66 | R57.2 R55.2 | C34.2 v10.92,16.38 | C51.2 23.93,30.53 v24.97,31.57 | R66.2 R94.2 39.17,33.17 39.04,33.05 36.98,33.05 v36.8,33.22 | C49.2 38.91,38.86 38.73,38.68 v38.73,37.85 | C16.1 51.59,7.2 v51.59,8.2 | U9.19 24.26,33.81 v24.41,33.66 | U5.4 19.63,18.71 v19.63,19.38 | C28.1 19.86,17.7 v19.18,17.7 | R2.2 23.7,17.86 24.08,17.86 24.46,18.24 v24.46,18.52 | R60.2 23.32,15.67 v23.67,15.32 | U1.5 41.02,13.59 v41.2,13.77 | R13.1 v33.98,7.98 | R12.2 38.15,7.67 38.46,7.98 v38.84,7.98
  Bottom 0.305: 8.51,34.7 R57.2
  pour Route2 (rank 6): -2.54,57.15 88.9,57.15 88.9,-2.54 -2.54,-2.54
  pour Top: 38.86,36.58 40.13,36.58 40.39,36.83 40.39,37.21 39.75,37.21 39.75,38.48 40.39,38.48 40.39,38.86 40.13,39.12 38.86,39.12 37.97,38.23 37.97,37.47
  pour Top (no thermals): 14.61,24.89 15.75,24.89 15.75,21.08 14.61,21.08
5.0V  (via drill 0.25 pad 0.46, 0.5, 0.6)
  Top 0.254: GPS.5 v44.17,3 | PWR.4 51.44,9.09 50.7,8.36 v50.7,3
  Top 0.406: 5VREG.3 50.29,47.62 49.25,47.62 46.91,49.96 46.91,51.97 46.35,52.53 v46.35,53.42
  Route2 0.61: v77.09,9.88 78.16,10.95 78.16,15.49 79.38,16.71 80.47,16.71 81.56,17.8 81.56,32.97 82.5,33.91 83.59,33.91 v83.62,33.93
  Bottom 0.152: 46.35,51.9 47.12,51.9 L1.2 | U8.5 U8.1 21.65,6.85 R95.2
  Bottom 0.406: 46.35,51.9 v46.35,53.42
  Bottom 0.61: v77.09,9.88 75.92,8.71 72.9,8.71 67.18,3 v50.7,3 v44.17,3 23.67,3 22.55,4.12 22.55,10.41 C63.1 | v58.12,43.33 65.81,43.33 66.55,44.07 66.55,46.2 68.56,48.21 75.64,48.21 83.8,40.06 83.8,34.11 v83.62,33.93
  pour Top (isolate 0.152, no thermals): 57.02,40.64 59.31,40.64 59.31,43.94 52.83,43.94 52.83,45.59 50.8,45.59 50.8,47.75 49.78,47.75 49.78,45.03 52.07,45.03 52.07,43.43 57.02,43.43
  pour Bottom (rank 2, no thermals): 22.73,13.72 24.13,13.72 24.13,10.16 21.08,10.16 21.08,11.94 22.73,11.94
32.768KHZ
  Top 0.254: U7.36 7.83,24.08 7.52,23.77 7.26,23.77 7.07,23.58 OSC1.3
AIN0
  Top 0.152: SIP.B6 58.32,17.37 58.32,16.66 58.67,16.31 59.59,16.31 61.37,14.53 61.65,14.53 61.92,14.25 62.48,14.25 62.69,14.04 ADC.3
AIN1
  Top 0.152: SIP.C7 56.44,19.25 56.44,18.97 57.05,18.36 57.05,17.93 57.33,17.65 57.53,17.65 58.01,17.17 58.01,16.51 58.52,16 59.46,16 61.24,14.22 61.52,14.22 61.69,14.05 ADC.4
AIN2
  Top 0.152: ADC.5 60.69,14.34 59.33,15.7 57.05,15.7 56.74,16 56.74,17.17 56.26,17.65 SIP.B7
AIN3
  Top 0.152: SIP.A7 56.26,15.82 56.69,15.39 59.21,15.39 59.79,14.81 59.79,14.33 59.69,14.22 ADC.6
ALT.BUFF.OE  (via drill 0.25 pad 0.46)